# Altium PCB Main Board.PcbDoc (part 1 of 2)
Units mm, origin at the board's own origin, x right, y up, seen from the top; angles counter-clockwise.
Board outline 100 x 75.8 mm, 4 copper layers (Top Layer, L1, L2, Bottom Layer), stack 1.743 mm thick; 166 components, 146 nets, 691 pads, 603 vias.
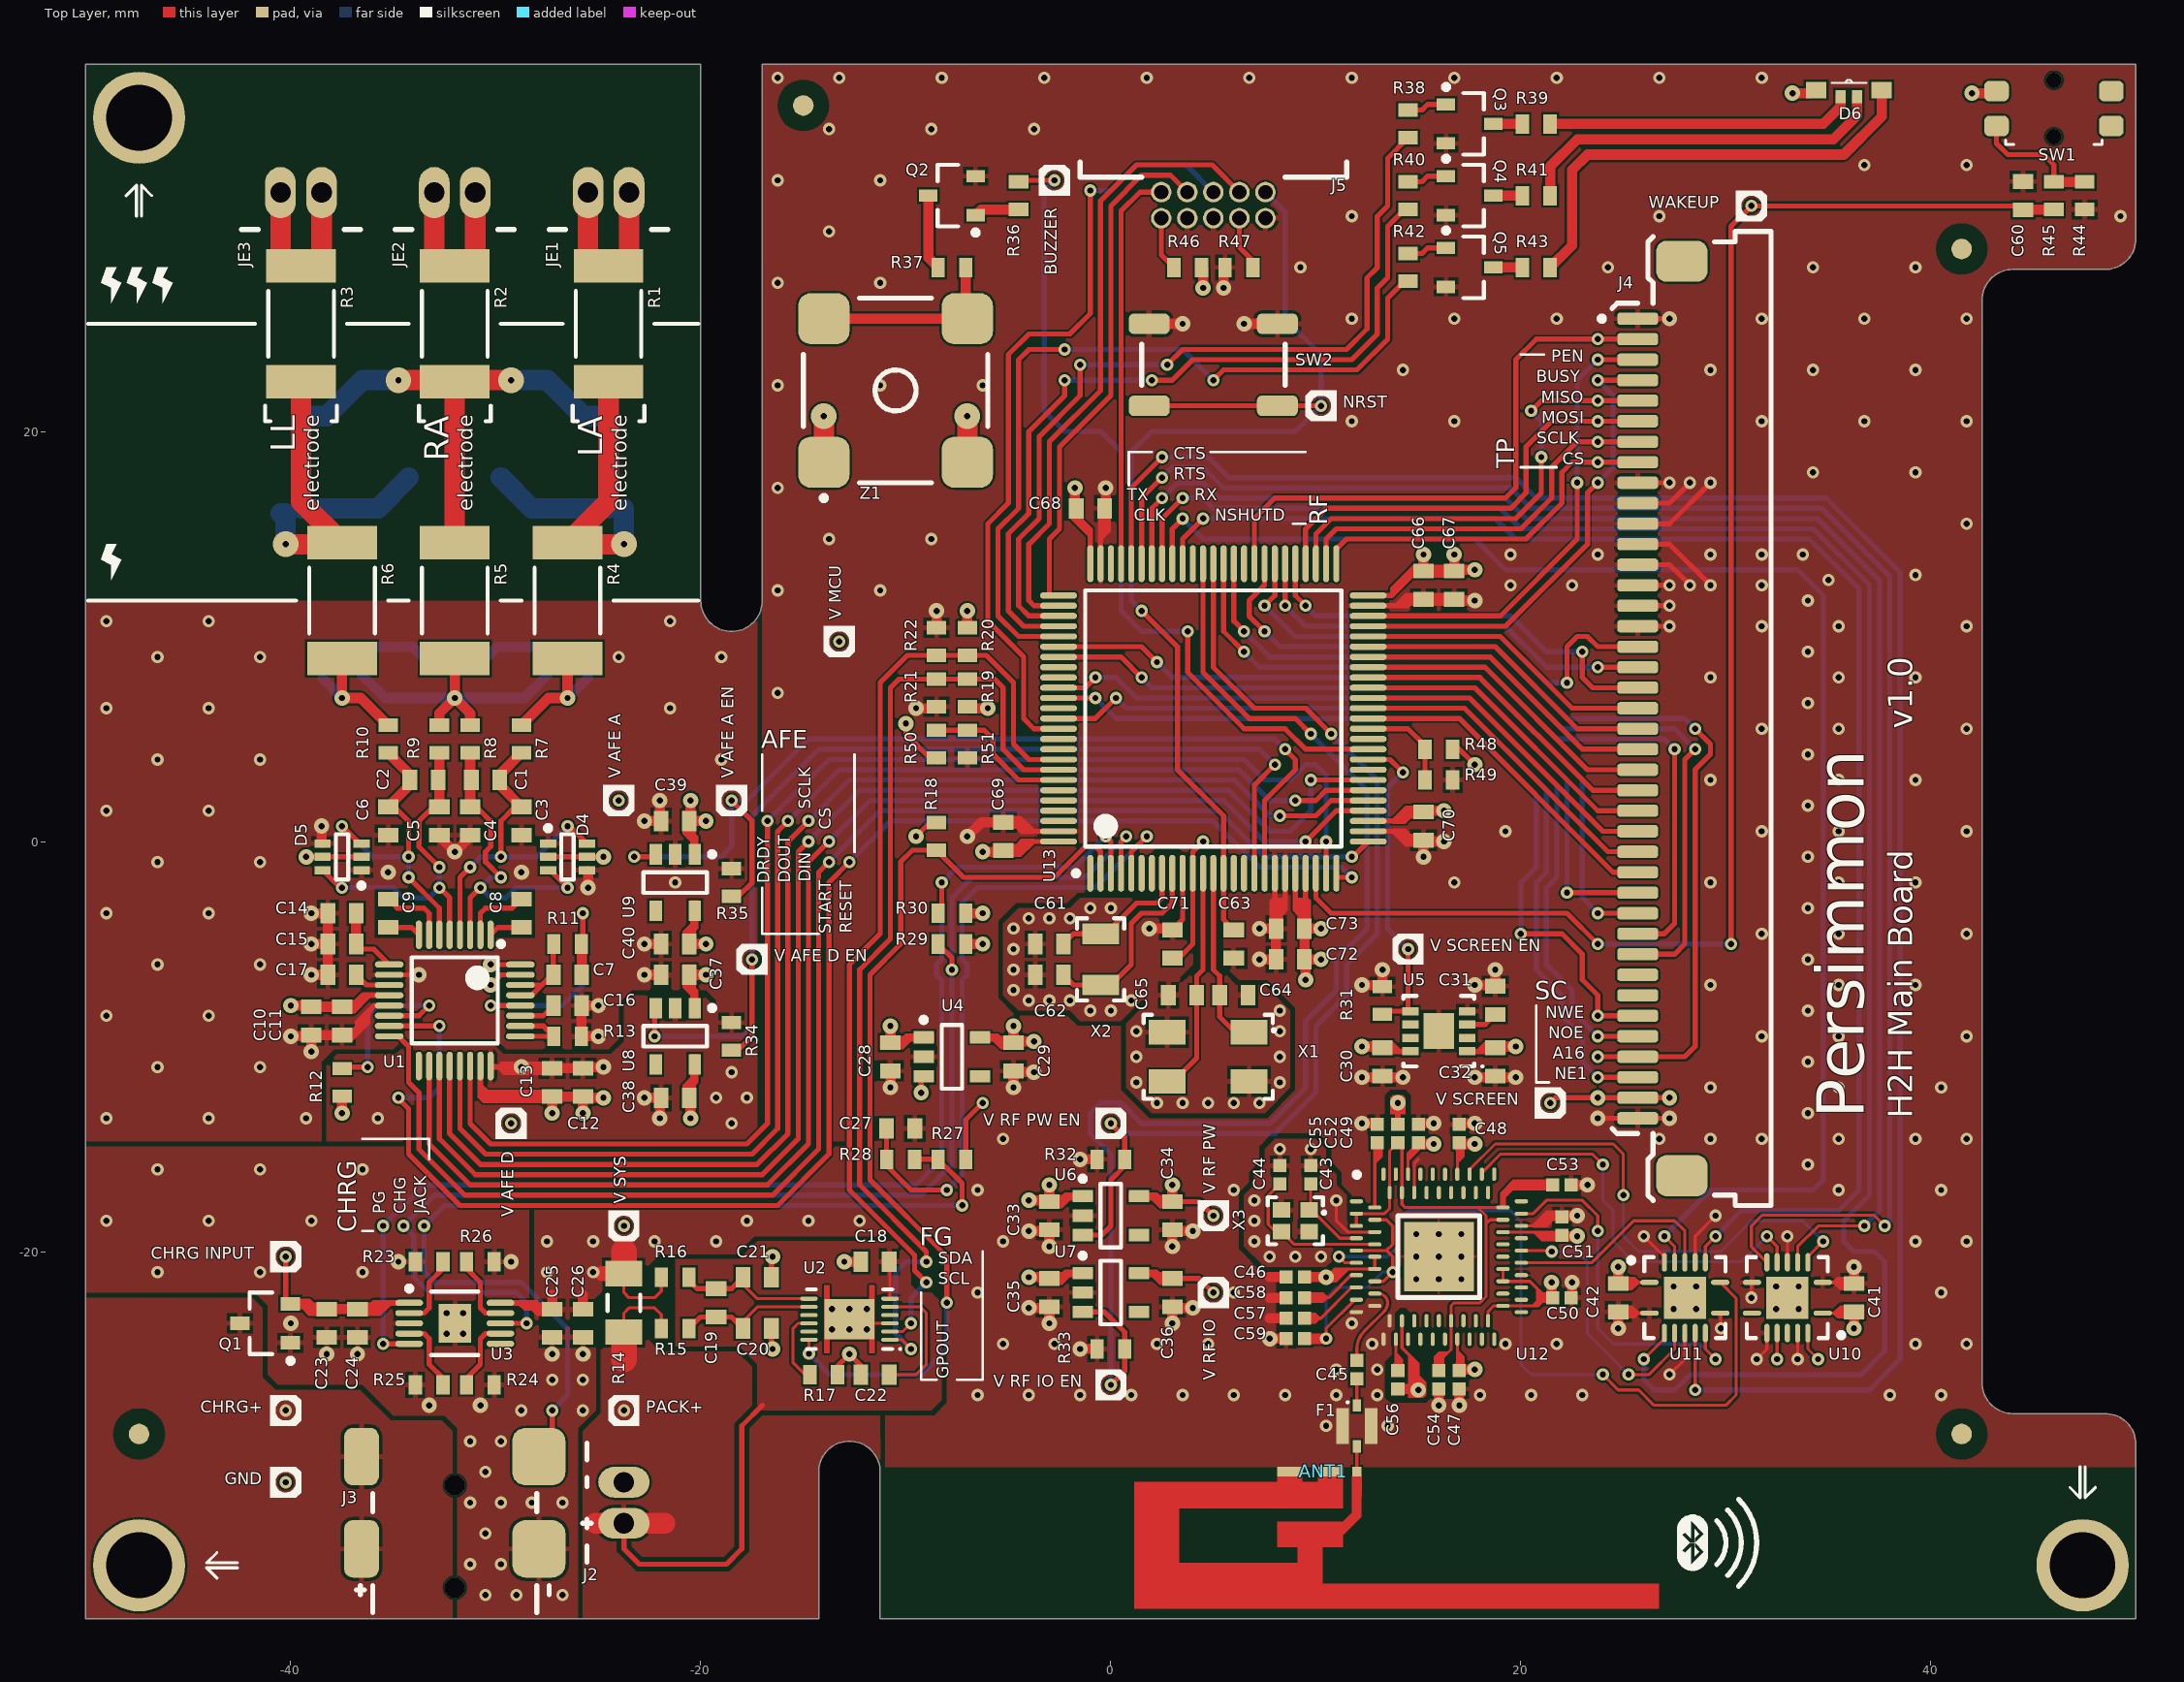
[diagram p0: Top Layer view]
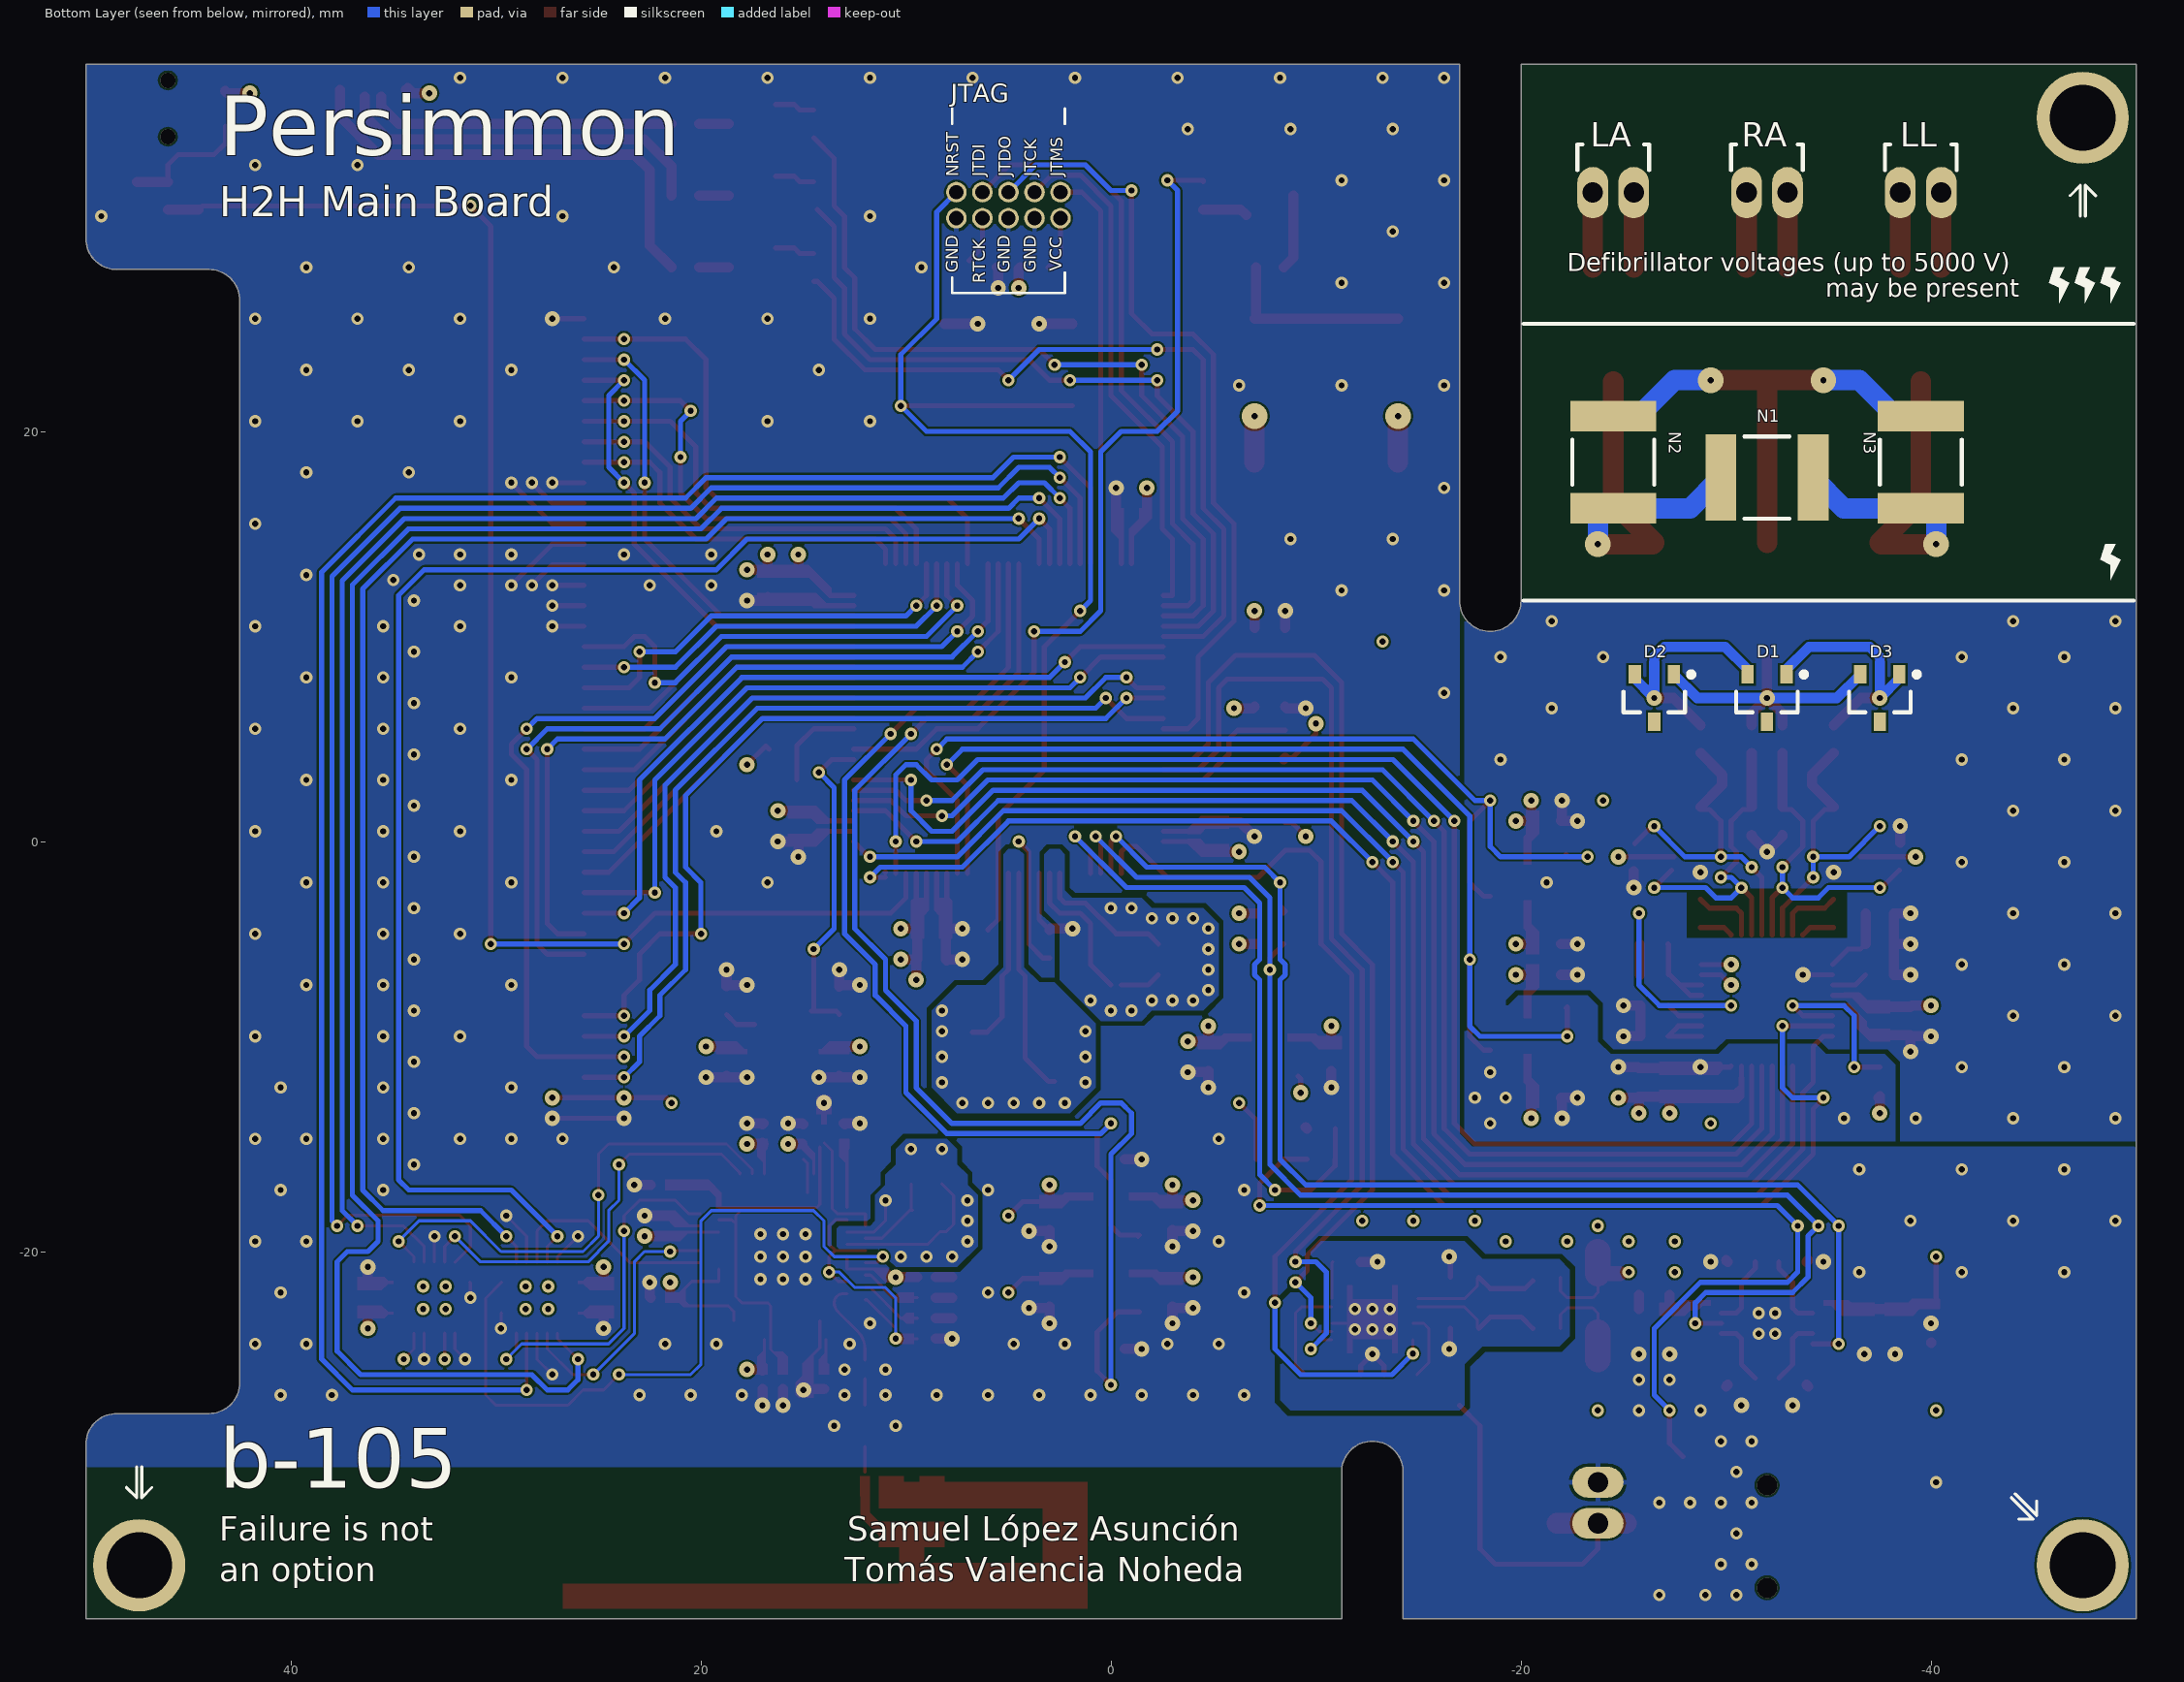
[diagram p1: Bottom Layer view, seen from below]
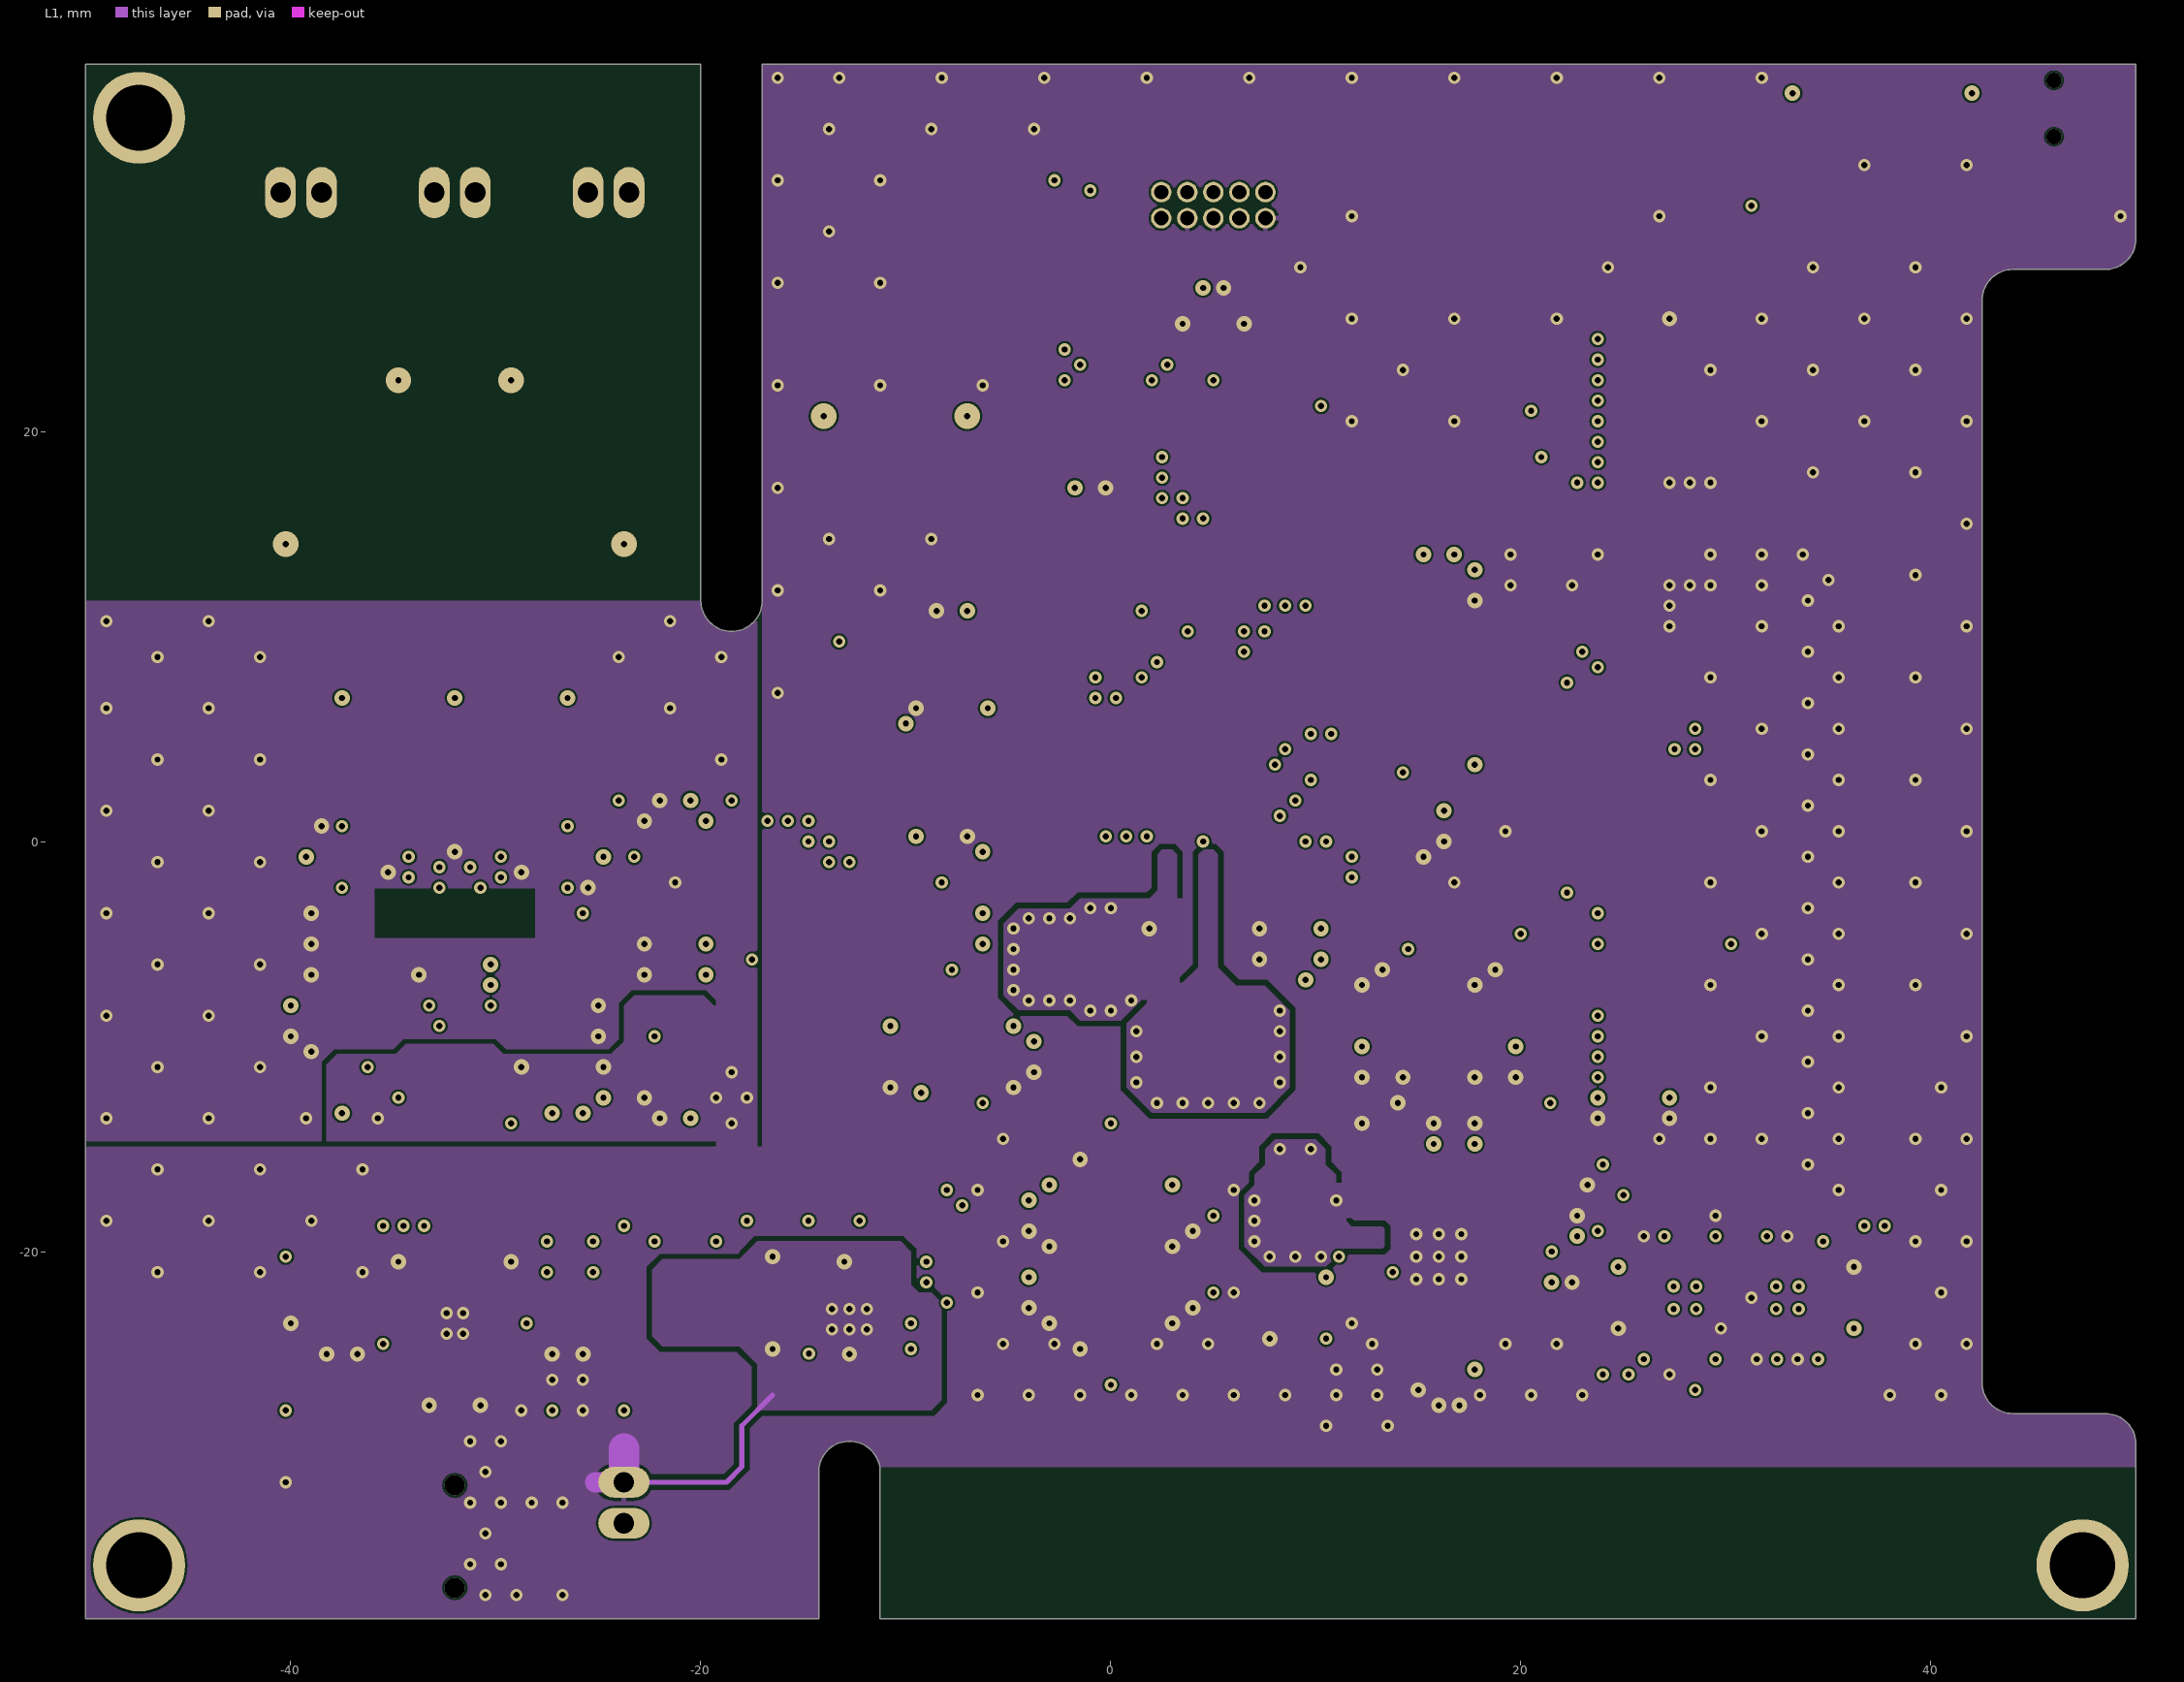
[diagram p2: L1]
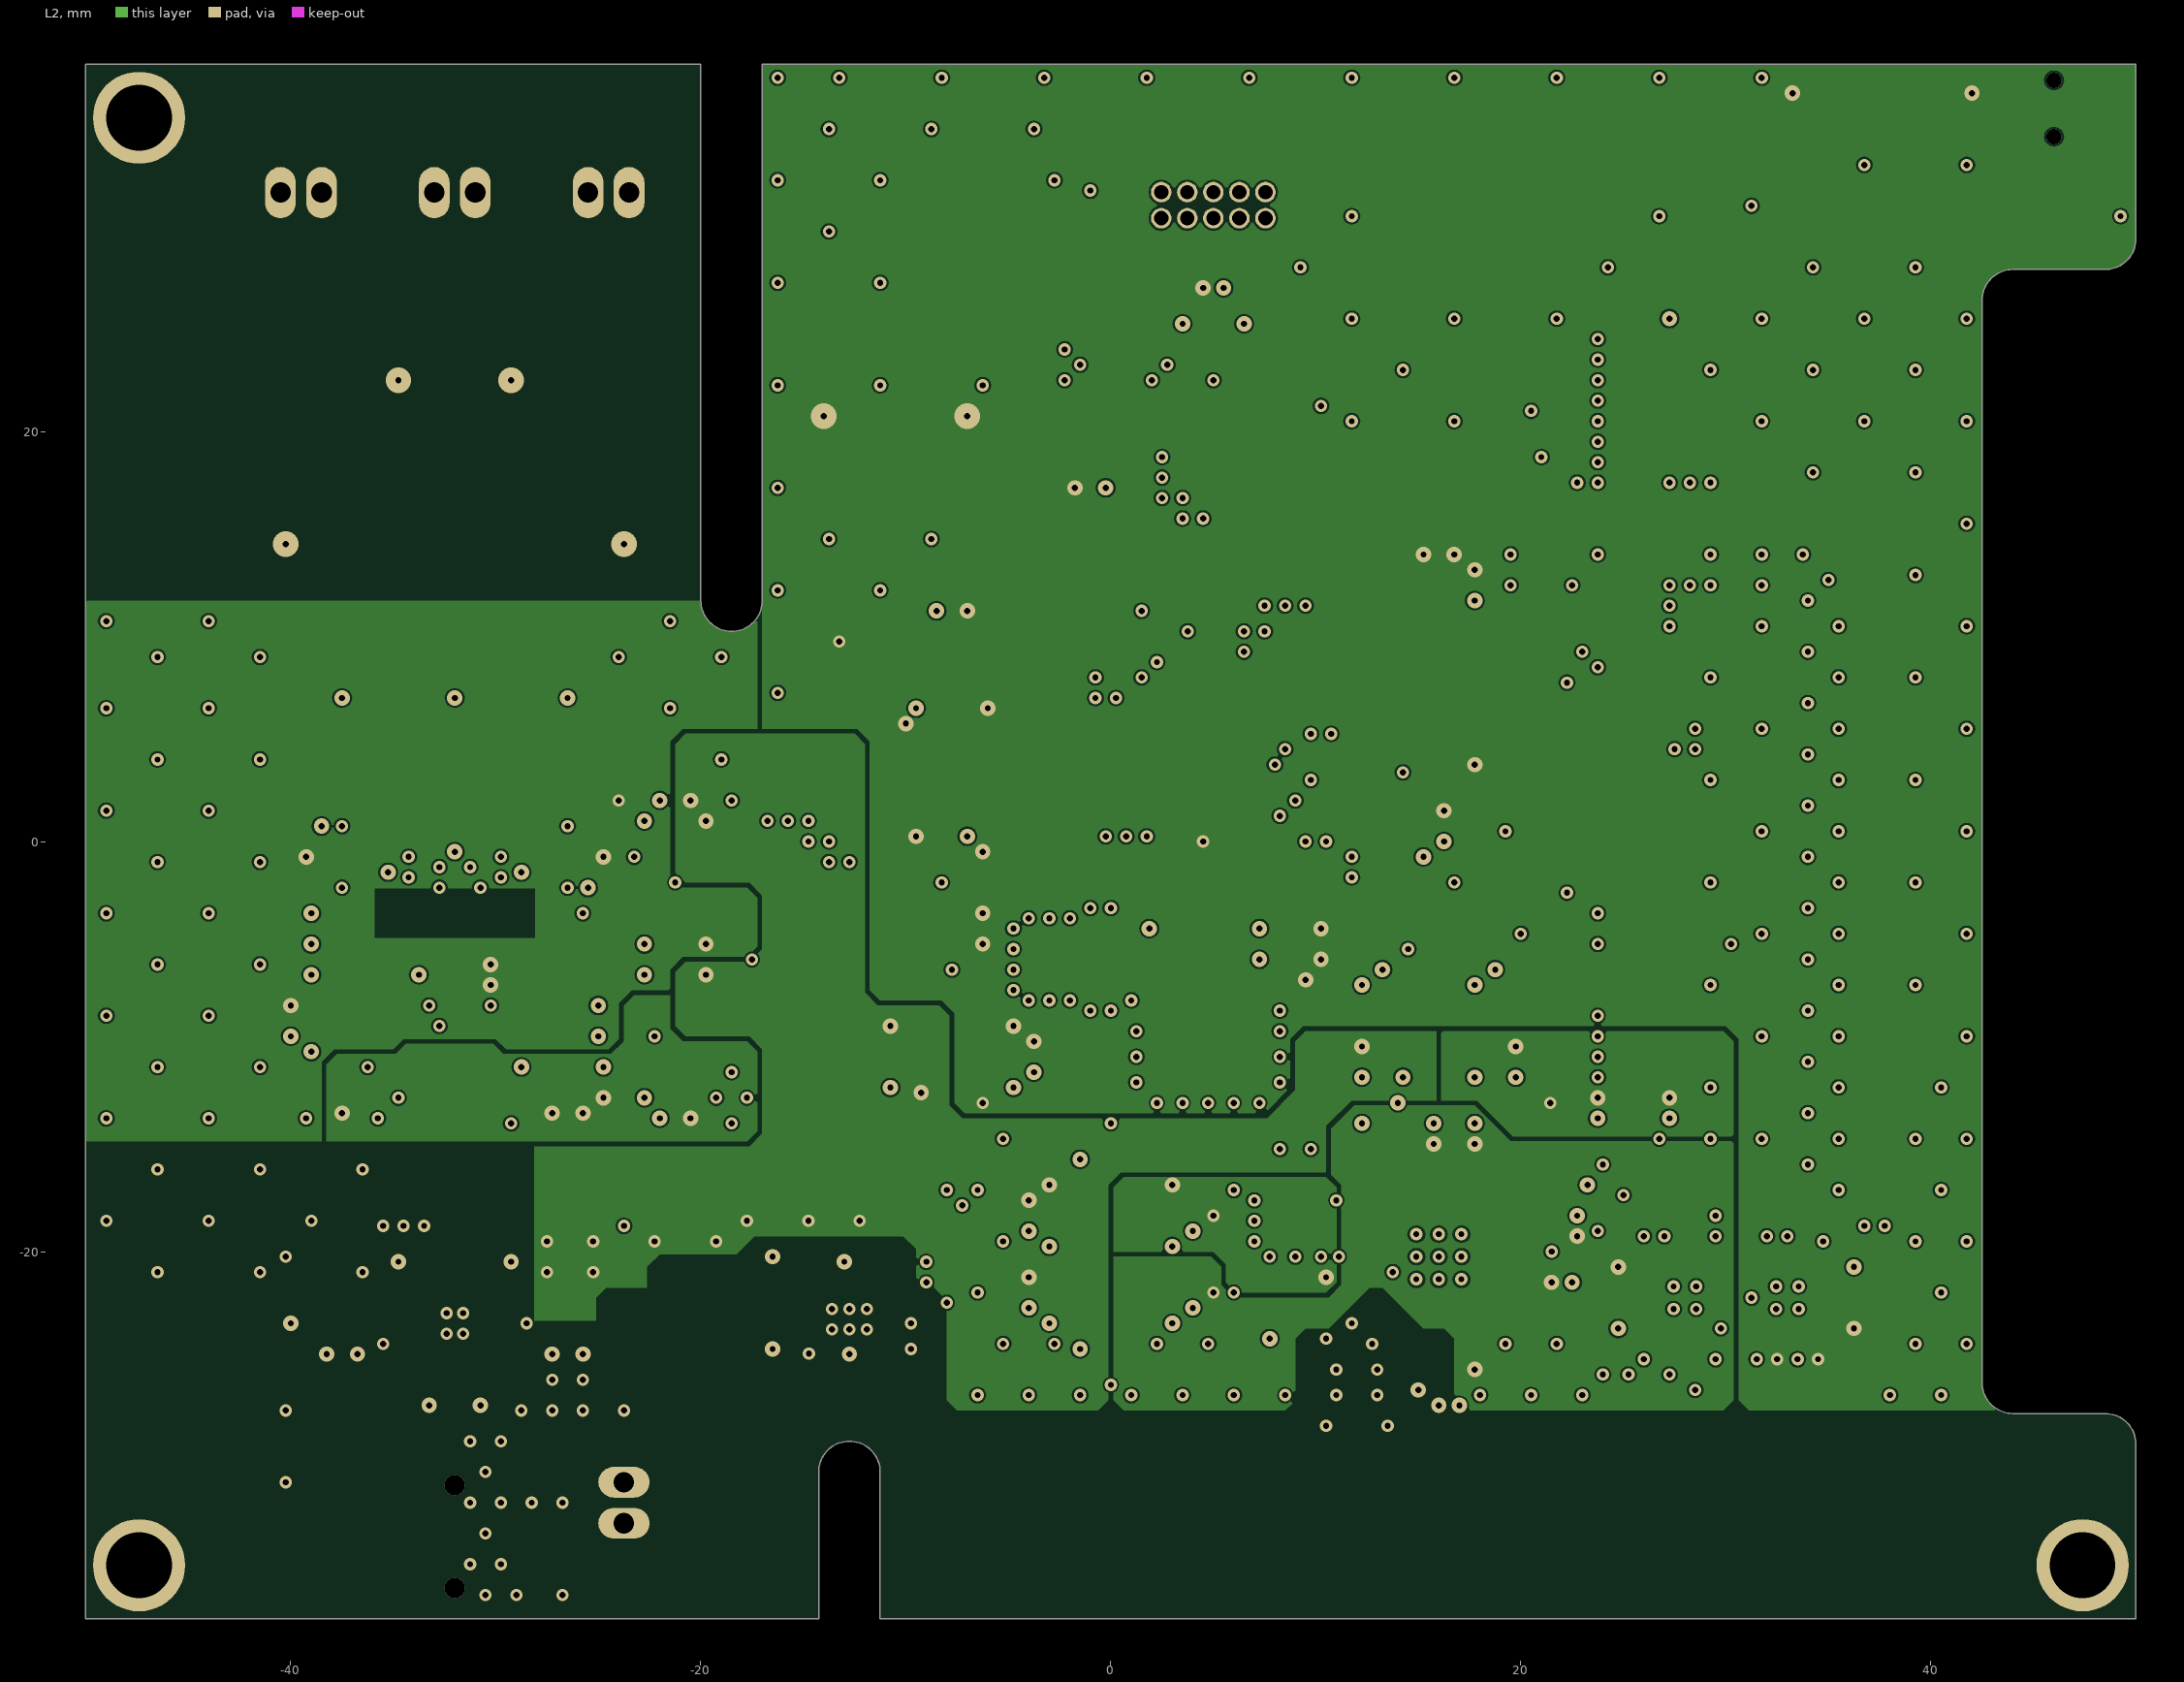
[diagram p3: L2]

## Layer stack, top to bottom
Top Solder: solder mask 0.0102, Solder Resist, Dk 3.5
Top Layer: signal copper 0.0356
Dielectric 1: core 0.2, FR-4, Dk 4.2
L1: signal copper 0.036
Dielectric 2: prepreg 1.2, FR-4, Dk 4.2
L2: signal copper 0.036
Dielectric 3: core 0.2, FR-4, Dk 4.2
Bottom Layer: signal copper 0.0356
Bottom Solder: solder mask 0.0102, Solder Resist, Dk 3.5

## Board outline
-14.25,-37.9 -14.25,-30.75 cw(c-12.75,-30.75) -12.75,-29.25 cw(c-12.75,-30.75) -11.25,-30.75 -11.25,-37.9 50,-37.9 50,-29.4 ccw(c48.5,-29.4) 48.5,-27.9 44,-27.9 cw(c44,-26.4) 42.5,-26.4 42.5,26.4 cw(c44,26.4) 44,27.9 48.5,27.9 ccw(c48.5,29.4) 50,29.4 50,37.9 -17,37.9 -17,11.75 cw(c-18.5,11.75) -18.5,10.25 cw(c-18.5,11.75) -20,11.75 -20,37.9 -50,37.9 -50,-37.9

## Design rules (kind name [scope] priority, off if disabled: settings)
Clearance "Fiducial Clearance" [(InPadClass('Fiducial Pads'))] p1: gap=0.75
Clearance "DefibProof Clearance" [InNetClass('DefibProof')] p2: gap=4
Clearance "DefibProofGDT Clearance" [InNetClass('DefibProofGDT')] p3: gap=2
Clearance "QFN Double Row Clearance" [InComponent('U12')] p4: gap=0.125
Clearance [All] p5: gap=0.1
ComponentClearance [All] p1: gap=0.25 collisioncheckmode=3 verticalgap=0.25 showdistances=FALSE
DiffPairsRouting [All] p1: maxlimit=0.5 minlimit=0.15 mostfreqgap=0.25 toplayer_minwidth=0.15 toplayer_maxwidth=2 toplayer_prefwidth=0.25 midlayer1_minwidth=0.15 midlayer1_maxwidth=2 midlayer1_prefwidth=0.25 midlayer2_minwidth=0.15 midlayer2_maxwidth=2 midlayer2_prefwidth=0.25 bottomlayer_minwidth=0.15 bottomlayer_maxwidth=2 bottomlayer_prefwidth=0.25 maxuncoupledlength=12.7
Height [All] p1: minheight=0 maxheight=25 prefheight=10
HoleSize [All] p1: absolutevalues=TRUE maxlimit=6.3 minlimit=0.3 maxpercent=80.000 minpercent=20.000
MinimumSolderMaskSliver [All] p1: minsoldermaskwidth=0.2
PlaneClearance [All] p1: clearance=0.3
PlaneConnect [All] p1: planeconnectstyle=Relief reliefexpansion=0.5 reliefentries=4 reliefconductorwidth=0.3 reliefairgap=0.3
PolygonConnect "GND RF" [All vs (InPadClass('RF GND Pads'))] p1: connectstyle=Direct reliefconductorwidth=0.125 reliefentries=4 polygonreliefangle="90 Angle" airgapwidth=0.125
PolygonConnect "GND Via Ring" [All vs IsVia] p2: connectstyle=Direct reliefconductorwidth=0.254 reliefentries=4 polygonreliefangle="90 Angle" airgapwidth=0.254
PolygonConnect "QFN Double Row" [All vs InComponent('U12')] p3: connectstyle=Relief reliefconductorwidth=0.125 reliefentries=4 polygonreliefangle="90 Angle" airgapwidth=0.125
PolygonConnect Default [All] p4: connectstyle=Relief reliefconductorwidth=0.25 reliefentries=4 polygonreliefangle="90 Angle" airgapwidth=0.15
RoutingVias [All] p1: holewidth=0.3 width=0.6 viastyle="Through Hole" minholewidth=0.3 minwidth=0.6 maxholewidth=6.3 maxwidth=5
SolderMaskExpansion [All] p1: expansion=0.102
Width [All] p1: maxlimit=2 minlimit=0.125 preferedwidth=0.25
23 further rules are at their usual default settings.

## Classes and differential pairs
pad class "Fiducial Pads": Free-FID1 Free-FID2 Free-FID3 Free-FID4
pad class "RF GND Pads": ANT1-2 F1-1 F1-3 U12-A10 U12-A11 U12-B9 U12-B10
net class "50 Ohm Line": BT_OUT NetANT1_1 NetC45_2
component class U_AFE: C1 C2 C3 C4 C5 C6 C7 C8 C9 C10 C11 C12 C13 C14 C15 C16 C17 D1 D2 D3 D4 D5 JE1 JE2 JE3 N1 N2 N3 R1 R2 R3 R4 R5 R6 R7 R8 R9 R10 R11 R12 R13 U1
component class U_Battery: C18 C19 C20 C21 C22 C23 C24 C25 C26 C27 J2 J3 Q1 R14 R15 R16 R17 R18 R19 R20 R21 R22 R23 R24 R25 R26 R27 R28 R29 R30 U2 U3
component class U_MCU: C60 C61 C62 C63 C64 C65 C66 C67 C68 C69 C70 C71 C72 C73 J5 R44 R45 R46 R47 R48 R49 R50 R51 SW1 SW2 U13 X1 X2
component class U_RF: ANT1 C41 C42 C43 C44 C45 C46 C47 C48 C49 C50 C51 C52 C53 C54 C55 C56 C57 C58 C59 F1 U10 U11 U12 X3
component class "U_User Interface": D6 J4 Q2 Q3 Q4 Q5 R36 R37 R38 R39 R40 R41 R42 R43 Z1
component class "U_Voltage Regulation": C28 C29 C30 C31 C32 C33 C34 C35 C36 C37 C38 C39 C40 R31 R32 R33 R34 R35 U4 U5 U6 U7 U8 U9
net class FSMC_D[15..0]: FSMC_D0 FSMC_D1 FSMC_D2 FSMC_D3 FSMC_D4 FSMC_D5 FSMC_D6 FSMC_D7 FSMC_D8 FSMC_D9 FSMC_D10 FSMC_D11 FSMC_D12 FSMC_D13 FSMC_D14 FSMC_D15
net class DefibProof: LA LL RA
net class DefibProofGDT: NetN1_1 NetN1_2 NetN2_1
differential pair X2: +X2_P -X2_N
differential pair X1: +X1_P -X1_N
differential pair AFE_IN1: +AFE_IN1_P -AFE_IN1_N
differential pair AFE_IN2: +AFE_IN2_P -AFE_IN2_N
differential pair FG_SR: +FG_SR_P -FG_SR_N

## Components (designator, comment, footprint, x,y, rotation, side; value= is the part's Value field where it differs from the comment)
ANT1 "2.4 GHz F-antenna" "Antenna Inverted F 2.4 GHz" 12,-30.5 r0 top net-tie
C1 "6.8n" C0603 -30.5,3 r0 top
C2 "6.8n" C0603 -33.5,3 r0 top
C3 "47p" C0603 -28.75,1 r90 top
C4 "47p" C0603 -31.25,1 r270 top
C5 "47p" C0603 -32.75,1 r90 top
C6 "47p" C0603 -35.25,1 r270 top
C7 "1.5n" C0603 -26.5,-6.5 r0 top
C8 "4.7n" C0603 -28.75,-3.5 r270 top
C9 "4.7n" C0603 -35.25,-3.5 r90 top
C10 "1u" C0603 -39,-8.75 r90 top
C11 "0.1u" C0603 -37.5,-8.75 r90 top
C12 "1u" C0603 -25.75,-11.75 r270 top
C13 "0.1u" C0603 -27.25,-11.75 r270 top
C14 "10u" C0603 -37.5,-3.5 r0 top
C15 "0.1u" C0603 -37.5,-5 r0 top
C16 "1u" C0603 -26.5,-8 r180 top
C17 "1u" C0603 -37.5,-6.5 r0 top
C18 "1u" C0603 -11.5,-20.5 r0 top
C19 "0.1u" C0603 -19.25,-22.5 r270 top
C20 "0.1u" C0603 -17.25,-23.75 r180 top
C21 "0.1u" C0603 -17.25,-21.25 r0 top
C22 "0.47u" C0603 -11.5,-26 r0 top
C23 "1u" C0603 -38.25,-23.5 r90 top
C24 "0.1u" C0603 -36.75,-23.5 r90 top
C25 "0.1u" C0603 -27.25,-23.5 r90 top
C26 "1u" C0603 -25.75,-23.5 r90 top
C27 "0.1u" C0603 -10.25,-14 r180 top
C28 "1u" C0603 -10.75,-10.5 r90 top
C29 "1u" C0603 -4.75,-10.5 r90 top
C30 "1u" C0603 13.25,-10.75 r90 top
C31 "0.1u" C0603 18.75,-7.75 r270 top
C32 "1u" C0603 18.75,-10.75 r90 top
C33 "1u" C0603 -3,-18.25 r90 top
C34 "1u" C0603 3,-18.25 r90 top
C35 "1u" C0603 -3,-22 r90 top
C36 "1u" C0603 3,-22 r90 top
C37 "1u" C0603 -21.25,-6.5 r0 top
C38 "1u" C0603 -21.25,-12.5 r0 top
C39 "1u" C0603 -21.25,1 r0 top
C40 "1u" C0603 -21.25,-5 r0 top
C41 "0.1u" C0603 36.25,-22.25 r270 top
C42 "0.1u" C0603 24.75,-22.25 r90 top
C43 "12p" C0402 9.75,-16.25 r270 top
C44 "12p" C0402 8.25,-16.25 r270 top
C45 "22p" C0402 12,-25.75 r270 top
C46 "1u" C0402 9,-21.25 r0 top
C47 "0.1u" C0402 17,-26.25 r90 top
C48 "0.1u" C0402 17,-14.25 r270 top
C49 "0.1u" C0402 15,-14.25 r270 top
C50 "0.1u" C0402 22,-22.25 r180 top
C51 "0.1u" C0402 22,-18.75 r270 top
C52 "0.1u" C0402 14,-14.25 r270 top
C53 "0.47u" C0402 22,-16.75 r180 top
C54 "0.47u" C0402 16,-26.25 r90 top
C55 "0.1u" C0402 13,-14.25 r270 top
C56 "0.1u" C0402 14,-26.25 r90 top
C57 "0.1u" C0402 9,-23.25 r0 top
C58 "0.1u" C0402 9,-22.25 r0 top
C59 "1u" C0402 9,-24.25 r0 top
C60 "0.47u" C0603 44.5,31.5 r270 top
C61 "6p" C0603 -3,-5 r0 top
C62 "6p" C0603 -3,-6.5 r0 top
C63 "10n" C0603 6,-5 r90 top
C64 "10p" C0603 6,-7.5 r180 top
C65 "10p" C0603 3.5,-7.5 r0 top
C66 "10u" C0603 15.25,12.5 r90 top
C67 "0.1u" C0603 16.75,12.5 r90 top
C68 "0.1u" C0603 -1,16.25 r180 top
C69 "0.1u" C0603 -5.25,0.25 r270 top
C70 "0.1u" C0603 15.25,0.75 r90 top
C71 "0.1u" C0603 3,-5 r270 top
C72 "1u" C0603 8.75,-5.75 r0 top
C73 "0.1u" C0603 8.75,-4.25 r0 top
D1 "PESD5V0X1" PESD5V0X1BT -32,7 r270 bottom
D2 "PESD5V0X1" PESD5V0X1BT -26.5,7 r270 bottom
D3 "PESD5V0X1" PESD5V0X1BT -37.5,7 r270 bottom
D4 "BAS70DW-04" BAS70DW-04 -26.5,-0.75 r0 top
D5 "BAS70DW-04" BAS70DW-04 -37.5,-0.75 r180 top
D6 "OVSRRGBCC3" OVSRRGBCC3/SIDE 36,37.9 r270 top locked
F1 "LFB212G45SG8A127" LFB212G45SG8A127 12,-28.5 r270 top
J2 "JST PH 2 Pin" S2B-PH-K-S -17.5,-32.25 r90 top
J3 "PJ-018H-SMT" PJ-018H-SMT -32,-37.9 r90 top
J4 "FFC 40 Pin" ER-CON40HB-2 32,6 r270 top
J5 "JTAG 10 Pin" 3220-10-0200-00 5,37.9 r0 top
JE1 "JST PH 2 Pin" S2B-PH-K-S -24.5,37.9 r180 top
JE2 "JST PH 2 Pin" S2B-PH-K-S -32,37.9 r180 top
JE3 "JST PH 2 Pin" S2B-PH-K-S -39.5,37.9 r180 top
N1 "GDT" 2051-09-SM -32,17.75 r0 bottom
N2 "GDT" 2051-09-SM -24.5,18.5 r270 bottom
N3 "GDT" 2051-09-SM -39.5,18.5 r90 bottom
Q1 "DMP3056L" DMP3056L -41.25,-23.5 r180 top
Q2 "2N7002P" 2N7002P -7.75,31.5 r180 top
Q3 "2N7002P" 2N7002P 17.5,35 r0 top
Q4 "2N7002P" 2N7002P 17.5,31.5 r0 top
Q5 "2N7002P" 2N7002P 17.5,28 r0 top
R1 "22k" R2512 -24.5,25.25 r270 top
R2 "22k" R2512 -32,25.25 r270 top
R3 "22k" R2512 -39.5,25.25 r270 top
R4 "22k" R2512 -26.5,11.75 r270 top
R5 "22k" R2512 -32,11.75 r270 top
R6 "22k" R2512 -37.5,11.75 r270 top
R7 "47k" R0603 -28.75,5 r270 top
R8 "47k" R0603 -31.25,5 r270 top
R9 "47k" R0603 -32.75,5 r270 top
R10 "47k" R0603 -35.25,5 r270 top
R11 "1M" R0603 -26.5,-5 r180 top
R12 "100" R0603 -37.5,-11.75 r90 top
R13 "100" R0603 -26.5,-9.5 r0 top
R14 "0.01" R1206 -23.75,-22.5 r90 top
R15 "100" R0603 -21.25,-23.75 r0 top
R16 "100" R0603 -21.25,-21.25 r0 top
R17 "1M" R0603 -14,-26 r0 top
R18 "10k" R0603 -8.5,0.25 r270 top
R19 "10k" R0603 -7,7.25 r90 top
R20 "10k" R0603 -7,9.75 r270 top
R21 "1M" R0603 -8.5,7.25 r270 top
R22 "1M" R0603 -8.5,9.75 r90 top
R23 "1.2k" R0603 -33.25,-20.5 r180 top
R24 "0" R0603 -30.75,-26.5 r0 top
R25 "2k" R0603 -33.25,-26.5 r180 top
R26 "10k" R0603 -30.75,-20.5 r0 top
R27 "1M" R0603 -7.75,-15.5 r180 top
R28 "470k" R0603 -10.25,-15.5 r0 top
R29 "100k" R0603 -7.75,-5 r180 top
R30 "100k" R0603 -7.75,-3.5 r180 top
R31 "1M" R0603 13.25,-7.75 r90 top
R32 "1M" R0603 0,-15.5 r180 top
R33 "1M" R0603 0,-24.75 r180 top
R34 "1M" R0603 -18.5,-9.5 r90 top
R35 "1M" R0603 -18.5,-2 r90 top
R36 "100" R0603 -4.5,31.5 r270 top
R37 "0" R0603 -7.75,28 r180 top
R38 "100" R0603 14.5,35 r90 top
R39 "680" R0603 20.75,35 r0 top
R40 "100" R0603 14.5,31.5 r90 top
R41 "220" R0603 20.75,31.5 r180 top
R42 "100" R0603 14.5,28 r270 top
R43 "220" R0603 20.75,28 r0 top
R44 "10k" R0603 47.5,31.5 r90 top
R45 "100k" R0603 46,31.5 r270 top
R46 "0" R0603 3.75,28 r180 top
R47 "10k" R0603 6.25,28 r0 top
R48 "10k" R0603 16,4.5 r0 top
R49 "10k" R0603 16,3 r180 top
R50 "10k" R0603 -8.5,4.75 r270 top
R51 "10k" R0603 -7,4.75 r90 top
SW1 "WS-TASU 436331045822" "WS-TASU 436331045822" 46,37.5 r180 top
SW2 "EVQ-Q2K01W" EVQ-Q2K01W 5,23.25 r180 top
U1 "ADS1292" ADS129x -32,-7.75 r270 top
U2 "BQ27441DRZR-G1A" BQ27441DRZx-G1A -12.75,-23.3 r180 top
U3 "BQ24090" BQ24090 -32,-23.5 r0 top
U4 "LP5907-3.3" LP5907 -7.75,-10.5 r0 top
U5 "TPS73633" TPS73633 16,-9.25 r180 top
U6 "LP5907-3.3" LP5907 0,-18.25 r0 top
U7 "LP5907-1.8" LP5907 0,-22 r0 top
U8 "LP5907-3.3" LP5907 -21.25,-9.5 r270 top
U9 "LP5907-3.3" LP5907 -21.25,-2 r270 top
U10 "SN74LV4T125" SN74LV4T125 33,-22.25 r180 top
U11 "SN74LV4T125" SN74LV4T125 28,-22.25 r0 top
U12 "CC2560A" CC256x 16,-20.25 r0 top
U13 "STM32L162VDT6" STM-LQFP100_N 5,6 r90 top
X1 "ABM3B-16.000MHZ-10-1-U" ABM3B-16.000MHZ-10-1-U 4.75,-10.5 r180 top
X2 "ABS07-120-32.768KHZ-T" ABS07-120-32.768KHZ-T -0.5,-5.75 r90 top
X3 "NX2016SA" NX2016SA 9,-18.5 r180 top
Z1 "2.7 kHz" KSSG74B16 -10.5,22 r0 top

## Footprints (in the part's own frame and the unit in brackets; to place one, negate y for a bottom-side part, rotate by r counter-clockwise, add the part's x,y. Pads: shape width x height; smd on the part's side, far side on the other; paste and mask are expansions set on the pad)
2N7002P [mm] "Transistor - MOSFET, N-Channel, 60V, 300mA"
  rect 0.9x0.6 smd: 1(-1.15,0.95) 2(-1.15,-0.95) 3(1.15,0)
  silkscreen extent -1.28,-1.5 0.7,1.92, body extent -0.7,-1.5 0.7,1.5, height 1.1
2051-09-SM [mm] "TVS - Gas Discharge Tube"
  rect 1.5x4.2 smd: 1(-2.25,0) 2(2.25,0)
  silkscreen extent -1.1,-2 1.1,2, body extent -2.4,-1.75 2.4,1.75, height 3
3220-10-0200-00 [mm] "Conn - JTAG, Header, Male, Right Angle, 10 Pin, 1.27mm Pitch, ARM Standard"
  round 1 hole 0.7 mask+0.05: 1(-2.54,-7.5) 2(-2.54,-6.23) 3(-1.27,-7.5) 4(-1.27,-6.23) 5(0,-7.5) 6(0,-6.23) 7(1.27,-7.5) 8(1.27,-6.23) 9(2.54,-7.5) 10(2.54,-6.23)
  silkscreen extent -6.5,-5.5 6.5,-4.75, body extent -6.35,-7.7 6.35,0, height 5.1
ABM3B-16.000MHZ-10-1-U [mm] "Crystal 16 MHz"
  rect 1.8x1.2 smd: 1(-2,-1.2) 2(2,-1.2) 3(2,1.2) 4(-2,1.2)
  silkscreen extent -3.22,-2.05 3.15,2.05, body extent -2.5,-1.6 2.5,1.6, height 1.1
ABS07-120-32.768KHZ-T [mm] "DFN, 2-Leads, Body 1,50x3,20mm, Pitch 2,45mm, IPC Medium Density"
  rect 1x1.8 smd: 1(-1.25,0) 2(1.25,0)
  silkscreen extent -2,-1.15 2,1.15, body extent -1.68,-0.82 1.68,0.82, height 0.9
ADS129x [mm] "TSQFP, 32-Leads, Body 5,00x5,00mm, Pitch 0,50mm, IPC Medium Density"
  oval 1.4x0.3 smd mask+0.05: 1(-3.2,1.75) 2(-3.2,1.25) 3(-3.2,0.75) 4(-3.2,0.25) 5(-3.2,-0.25) 6(-3.2,-0.75) 7(-3.2,-1.25) 8(-3.2,-1.75) 17(3.2,-1.75) 18(3.2,-1.25) 19(3.2,-0.75) 20(3.2,-0.25) 21(3.2,0.25) 22(3.2,0.75) 23(3.2,1.25) 24(3.2,1.75)
  oval 0.3x1.4 smd mask+0.05: 9(-1.75,-3.2) 10(-1.25,-3.2) 11(-0.75,-3.2) 12(-0.25,-3.2) 13(0.25,-3.2) 14(0.75,-3.2) 15(1.25,-3.2) 16(1.75,-3.2) 25(1.75,3.2) 26(1.25,3.2) 27(0.75,3.2) 28(0.25,3.2) 29(-0.25,3.2) 30(-0.75,3.2) 31(-1.25,3.2) 32(-1.75,3.2)
  silkscreen extent -2.87,-2.1 2.1,2.38, body extent -2.5,-2.5 2.5,2.5, height 1.2
"Antenna Inverted F 2.4 GHz" [mm] "Antenna - Inverted F 2.4 GHz"
  rect 0.46x0.46 smd paste-1.2: 1(0,-0.23)
  rect 1.2x0.46 smd paste-1.2: 2(-3.28,-0.23) 2(-1.28,-0.23)
  Top Layer region: -0.68,-0.46 -0.68,-2.03 -8.68,-2.03 -8.68,-4.7 -2.88,-4.7 -2.88,-3.9 -3.88,-3.9 -3.88,-2.69 -0.68,-2.69 -0.23,-2.24 -0.23,-0.46 0.229,-0.46 0.225,-2.435 -0.68,-3.34 -0.68,-3.9 -1.68,-3.9 -1.68,-5.7 14.72,-5.7 14.72,-6.91 -10.86,-6.91 -10.86,-0.74 -3.88,-0.74 -3.88,-0.46 -2.68,-0.46 -2.68,-0.74 -1.88,-0.74 -1.88,-0.46
BAS70DW-04 [mm] "SOT23, 6-Leads, Body 2,00x2,10mm, Pitch 0,65mm, IPC Medium Density"
  rect 0.8x0.4 smd mask+0.05: 1(-0.95,0.65) 2(-0.95,0) 3(-0.95,-0.65) 4(0.95,-0.65) 5(0.95,0) 6(0.95,0.65)
  silkscreen extent -1.07,-1.1 0.3,1.52, body extent -0.67,-1.1 0.67,1.1, height 1.1
BQ24090 [mm] "TSSOP, 10-Leads, Body 3,00x3,00mm, Pitch 0,50mm, Thermal Pad 1,88x1,57mm, IPC Medium Density"
  oval 1.35x0.3 smd mask+0.05: 1(-2.225,1) 2(-2.225,0.5) 3(-2.225,0) 4(-2.225,-0.5) 5(-2.225,-1) 6(2.225,-1) 7(2.225,-0.5) 8(2.225,0) 9(2.225,0.5) 10(2.225,1)
  rect 1.57x1.88 smd mask+0.05: Pad(0,0)
  silkscreen extent -2.35,-1.55 1.15,1.82, body extent -1.55,-1.55 1.55,1.55, height 1.1
BQ27441DRZx-G1A [mm] "SON, 12-Leads, Body 4x2.5mm, Pitch 0.4mm, Thermal Pad 1.95x2.45mm, TI Recommended"
  oval 0.85x0.2 smd paste-0.1 mask+0.05: 1(-1.975,1) 2(-1.975,0.6) 3(-1.975,0.2) 4(-1.975,-0.2) 5(-1.975,-0.6) 6(-1.975,-1) 7(1.975,-1) 8(1.975,-0.6) 9(1.975,-0.2) 10(1.975,0.2) 11(1.975,0.6) 12(1.975,1)
  rect 2.45x1.95 smd paste-0.975 mask+0.05: 13(0,0)
  Top Layer region: -1.225,-1.65 -1.225,1.65 -0.975,1.65 -0.975,0.975 0.975,0.975 0.975,1.65 1.225,1.65 1.225,-1.65 0.975,-1.65 0.975,-0.975 -0.975,-0.975 -0.975,-1.65
  silkscreen extent -2.52,-1.45 2.07,1.5, body extent -2.07,-1.3 2.08,1.3, height 1
C0402 [mm] "Chip Capacitor, 2-Leads, Body 1,00x0,50mm, IPC Medium Density"
  rect 0.64x0.64 smd mask+0.05: 1(-0.45,0) 2(0.45,0)
  body extent -0.5,-0.25 0.5,0.25, height 0.5
C0603 [mm] "Chip Capacitor, 2-Leads, Body 1,55x0,85mm, IPC Medium Density"
  rect 0.72x1 smd: 1(-0.69,0) 2(0.69,0)
  body extent -0.8,-0.48 0.8,0.47, height 0.5
CC256x [mm] "Double Row QFN, 76-Leads, Body 8,00x8,00mm, Pitch 0,60mm, Thermal Pad 3,40x3,40mm, IPC Low Density"
  oval 0.65x0.2 smd mask+0.07: A1(-4.025,2.7) A2(-4.025,2.1) A3(-4.025,1.5) A4(-4.025,0.9) A5(-4.025,0.3) A6(-4.025,-0.3) A7(-4.025,-0.9) A8(-4.025,-1.5) A9(-4.025,-2.1) A10(-4.025,-2.7) A21(4.025,-2.7) A22(4.025,-2.1) A23(4.025,-1.5) A24(4.025,-0.9) A25(4.025,-0.3) A26(4.025,0.3) A27(4.025,0.9) A28(4.025,1.5) A29(4.025,2.1) A30(4.025,2.7) B1(-3.125,2.4) B2(-3.125,1.8) B3(-3.125,1.2) B4(-3.125,0.6) B5(-3.125,0) B6(-3.125,-0.6) B7(-3.125,-1.2) B8(-3.125,-1.8) B9(-3.125,-2.4) B19(3.125,-2.4) B20(3.125,-1.8) B21(3.125,-1.2) B22(3.125,-0.6) B23(3.125,0) B24(3.125,0.6) B25(3.125,1.2) B26(3.125,1.8) B27(3.125,2.4)
  oval 0.2x0.65 smd mask+0.07: A11(-2.7,-4.025) A12(-2.1,-4.025) A13(-1.5,-4.025) A14(-0.9,-4.025) A15(-0.3,-4.025) A16(0.3,-4.025) A17(0.9,-4.025) A18(1.5,-4.025) A19(2.1,-4.025) A20(2.7,-4.025) A31(2.7,4.025) A32(2.1,4.025) A33(1.5,4.025) A34(0.9,4.025) A35(0.3,4.025) A36(-0.3,4.025) A37(-0.9,4.025) A38(-1.5,4.025) A39(-2.1,4.025) A40(-2.7,4.025) B10(-2.4,-3.125) B11(-1.8,-3.125) B12(-1.2,-3.125) B13(-0.6,-3.125) B14(0,-3.125) B15(0.6,-3.125) B16(1.2,-3.125) B17(1.8,-3.125) B18(2.4,-3.125) B28(2.4,3.125) B29(1.8,3.125) B30(1.2,3.125) B31(0.6,3.125) B32(0,3.125) B33(-0.6,3.125) B34(-1.2,3.125) B35(-1.8,3.125) B36(-2.4,3.125)
  rect 3.4x3.4 smd mask+0.07: Pad(0,0)
  silkscreen extent -4.12,-2 2,4.12, body extent -4.05,-4.05 4.05,4.05, height 0.9
DMP3056L [mm] "SOT23, 3-Leads, Body 2,92x2,50mm, Pitch 0,95mm, IPC Medium Density"
  rect 0.95x0.65 smd: 1(-1.235,0.95) 2(-1.235,-0.95) 3(1.235,0)
  silkscreen extent -1.36,-1.5 0.76,1.95, body extent -0.76,-1.52 0.76,1.52, height 1.12
ER-CON40HB-2 [mm] "Conn - FFC/FPC, 40 Pin, 1.0mm Pitch, ZIF"
  rrect50% 0.6x2 smd: 1(-19.5,-6.3) 2(-18.5,-6.3) 3(-17.5,-6.3) 4(-16.5,-6.3) 5(-15.5,-6.3) 6(-14.5,-6.3) 7(-13.5,-6.3) 8(-12.5,-6.3) 9(-11.5,-6.3) 10(-10.5,-6.3) 11(-9.5,-6.3) 12(-8.5,-6.3) 13(-7.5,-6.3) 14(-6.5,-6.3) 15(-5.5,-6.3) 16(-4.5,-6.3) 17(-3.5,-6.3) 18(-2.5,-6.3) 19(-1.5,-6.3) 20(-0.5,-6.3) 21(0.5,-6.3) 22(1.5,-6.3) 23(2.5,-6.3) 24(3.5,-6.3) 25(4.5,-6.3) 26(5.5,-6.3) 27(6.5,-6.3) 28(7.5,-6.3) 29(8.5,-6.3) 30(9.5,-6.3) 31(10.5,-6.3) 32(11.5,-6.3) 33(12.5,-6.3) 34(13.5,-6.3) 35(14.5,-6.3) 36(15.5,-6.3) 37(16.5,-6.3) 38(17.5,-6.3) 39(18.5,-6.3) 40(19.5,-6.3)
  rrect50% 2x2.5 smd: ""(-22.3,-4.15) ""(22.3,-4.15)
  silkscreen extent -23.75,-8.17 23.75,0.2, body extent -23.5,-6.8 23.5,0, height 2.5
EVQ-Q2K01W [mm] "Switch - Tactile, Off-Mom, SPST"
  rrect50% 2x1 smd: 1(-3.125,-2) 2(3.125,-2) 3(3.125,2) 4(-3.125,2)
  silkscreen extent -3.5,-1 3.5,1, body extent -3.5,-3 3.5,3, height 2
KSSG74B16 [mm] "Transductor - Buzzer 2.7 kHz"
  rrect50% 2.5x2.5 smd paste-0.25: 1(-3.5,-3.5) 1(3.5,-3.5) 2(-3.5,3.5) 2(3.5,3.5)
  silkscreen extent -4.5,-5.37 4.5,4.5, body extent -4.25,-4.25 4.25,4.25, height 3
LFB212G45SG8A127 [mm] "Filter - RF 2.4 GHz"
  rect 1.75x0.6 smd mask+0.05: 1(0,0.7) 3(0,-0.7)
  rect 0.6x0.4 smd mask+0.05: 2(1,0) 4(-1,0)
  silkscreen extent -1.2,-0.5 -1.1,-0.4, body extent -1.01,-0.63 1.01,0.63, height 1
LP5907 [mm] "SOT23, 5-Leads, Body 2,90x2,80mm, Pitch 0,95mm, IPC Medium Density"
  rect 1x0.6 smd: 1(-1.375,0.95) 2(-1.375,0) 3(-1.375,-0.95) 4(1.375,-0.95) 5(1.375,0.95)
  silkscreen extent -1.5,-1.55 0.5,1.92, body extent -0.88,-1.52 0.87,1.53, height 1.45
NX2016SA [mm] "Crystal - 26 MHz"
  rect 0.85x0.75 smd mask+0.075: 1(-0.675,-0.525) 2(0.675,-0.525) 3(0.675,0.525) 4(-0.675,0.525)
  silkscreen extent -1.42,-1.15 1.35,1.15, body extent -1,-0.8 1,0.8, height 0.5
OVSRRGBCC3/SIDE [mm] "LED - RGB, Side-emmiting"
  rect 0.65x0.5 smd mask+0.075: 1(1.575,-0.4) 2(1.575,0.4)
  rect 0.8x1 smd mask+0.075: 3(1.25,1.6) 4(1.25,-1.6)
  silkscreen extent 0.75,-0.85 0.9,0.85, body extent -0.01,-1.6 1.5,1.6, height 1
PESD5V0X1BT [mm] "SOT23, 3-Leads, Body 2,90x2,30mm, Pitch 0,95mm, IPC Medium Density"
  rect 0.9x0.6 smd: 1(-1.15,0.95) 2(-1.15,-0.95) 3(1.15,0)
  silkscreen extent -1.27,-1.5 0.7,1.92, body extent -0.7,-1.5 0.7,1.5, height 1.1
PJ-018H-SMT [mm] "Conn - DC Power, Male, PCB, 4.0 mmOD / 1.7 mmID"
  rrect50% 2.8x1.7 smd: 1(3.4,4.55) 1(7.9,4.55)
  rrect50% 2.8x2.6 smd: 2(3.4,-4.1) 3(7.9,-4.1)
  silkscreen extent 0.3,-4.6 6.1,4.8, body extent 0,-5 9.3,5, height 5.5
R0603 [mm] "Chip Resistor, 2-Leads, Body 1,55x0,85mm, IPC Medium Density"
  rect 0.65x0.95 smd: 1(-0.675,0) 2(0.675,0)
  body extent -0.8,-0.48 0.8,0.48, height 0.5
R1206 [mm] "Chip Resistor, 2-Leads, Body 3,20x1,60mm, IPC Medium Density"
  rect 1.25x1.8 smd: 1(-1.425,0) 2(1.425,0)
  silkscreen extent -0.4,-0.8 0.4,0.8, body extent -1.7,-0.9 1.7,0.9, height 0.7
R2512 [mm] "Chip Resistor, 2-Leads, Body 6,40x3,20mm, IPC Medium Density"
  rect 1.65x3.4 smd: 1(-2.825,0) 2(2.825,0)
  silkscreen extent -1.6,-1.6 1.6,1.6, body extent -3.3,-1.7 3.3,1.7, height 0.9
S2B-PH-K-S [mm] "Conn - Battery, Male, 2 Pin, PCB, Right Angle"
  oval 1.5x2.5 hole 1: 1(-1,6.25) 2(1,6.25)
  silkscreen extent -2.9,7.85 2.9,8.25, body extent -3,0 3,8, height 4.8
SN74LV4T125 [mm] "QFN, 14-Leads, Body 3,50x3,50mm, Pitch 0,50mm/1,50mm, Thermal Pad 2,05x2,05mm, IPC Medium Density"
  oval 0.9x0.25 smd mask+0.07: 1(-1.725,-0.75) 7(1.725,-0.75) 8(1.725,0.75) 14(-1.725,0.75)
  oval 0.25x0.9 smd mask+0.07: 2(-1,-1.725) 3(-0.5,-1.725) 4(0,-1.725) 5(0.5,-1.725) 6(1,-1.725) 9(1,1.725) 10(0.5,1.725) 11(0,1.725) 12(-0.5,1.725) 13(-1,1.725)
  rect 2.05x2.05 smd mask+0.07: Pad(0,0)
  silkscreen extent -2.75,-1.97 1.97,1.97, body extent -1.83,-1.83 1.83,1.83, height 1
STM-LQFP100_N [mm] "Thin QFP, 100-Leads, Body 14x14mm, Pitch 0.5mm, IPC Medium Density"
  oval 1.8x0.3 smd mask+0.05: 1(-7.55,6) 2(-7.55,5.5) 3(-7.55,5) 4(-7.55,4.5) 5(-7.55,4) 6(-7.55,3.5) 7(-7.55,3) 8(-7.55,2.5) 9(-7.55,2) 10(-7.55,1.5) 11(-7.55,1) 12(-7.55,0.5) 13(-7.55,0) 14(-7.55,-0.5) 15(-7.55,-1) 16(-7.55,-1.5) 17(-7.55,-2) 18(-7.55,-2.5) 19(-7.55,-3) 20(-7.55,-3.5) 21(-7.55,-4) 22(-7.55,-4.5) 23(-7.55,-5) 24(-7.55,-5.5) 25(-7.55,-6) 51(7.55,-6) 52(7.55,-5.5) 53(7.55,-5) 54(7.55,-4.5) 55(7.55,-4) 56(7.55,-3.5) 57(7.55,-3) 58(7.55,-2.5) 59(7.55,-2) 60(7.55,-1.5) 61(7.55,-1) 62(7.55,-0.5) 63(7.55,0) 64(7.55,0.5) 65(7.55,1) 66(7.55,1.5) 67(7.55,2) 68(7.55,2.5) 69(7.55,3) 70(7.55,3.5) 71(7.55,4) 72(7.55,4.5) 73(7.55,5) 74(7.55,5.5) 75(7.55,6)
  oval 0.3x1.8 smd mask+0.05: 26(-6,-7.55) 27(-5.5,-7.55) 28(-5,-7.55) 29(-4.5,-7.55) 30(-4,-7.55) 31(-3.5,-7.55) 32(-3,-7.55) 33(-2.5,-7.55) 34(-2,-7.55) 35(-1.5,-7.55) 36(-1,-7.55) 37(-0.5,-7.55) 38(0,-7.55) 39(0.5,-7.55) 40(1,-7.55) 41(1.5,-7.55) 42(2,-7.55) 43(2.5,-7.55) 44(3,-7.55) 45(3.5,-7.55) 46(4,-7.55) 47(4.5,-7.55) 48(5,-7.55) 49(5.5,-7.55) 50(6,-7.55) 76(6,7.55) 77(5.5,7.55) 78(5,7.55) 79(4.5,7.55) 80(4,7.55) 81(3.5,7.55) 82(3,7.55) 83(2.5,7.55) 84(2,7.55) 85(1.5,7.55) 86(1,7.55) 87(0.5,7.55) 88(0,7.55) 89(-0.5,7.55) 90(-1,7.55) 91(-1.5,7.55) 92(-2,7.55) 93(-2.5,7.55) 94(-3,7.55) 95(-3.5,7.55) 96(-4,7.55) 97(-4.5,7.55) 98(-5,7.55) 99(-5.5,7.55) 100(-6,7.55)
  silkscreen extent -7.67,-6.25 6.25,6.82, body extent -7,-7 7,7, height 1.6
TPS73633 [mm] "PSON, 8-Leads, Body 3,00x3,00mm, Pitch 0,65mm, Thermal Pad 1,75x1,50mm, IPC Medium Density"
  rect 0.8x0.4 smd mask+0.05: 1(-1.39,0.975) 2(-1.39,0.325) 3(-1.39,-0.325) 4(-1.39,-0.975) 5(1.39,-0.975) 6(1.39,-0.325) 7(1.39,0.325) 8(1.39,0.975)
  rect 1.5x1.75 smd mask+0.05: Pad(0,0)
  silkscreen extent -2.17,-1.72 1.73,1.77, body extent -1.58,-1.57 1.58,1.58, height 1
"WS-TASU 436331045822" [mm] "Switch - Tactile, Off-Mom, SPST, Side-Actuated"
  rrect50% 1.2x1 smd: 1(2.8,2.6) 2(2.8,0.9) 3(-2.8,2.6) 4(-2.8,0.9)
  silkscreen extent -2.35,3.3 2.35,3.5, body extent -3.2,-1 3.2,3.5, height 1.65

## Part data
ANT1: library part "ANT 2.4 GHz", "Antenna - Inverted F 2.4 GHz"
C1 C2 C3 C4 C5 C6 C7 C8 C9 C10 C11 C12 C13 C14 C15 C16 C17 C18 C19 C20 C21 C22 C23 C24 C25 C26 C27 C28 C29 C30 C31 C32 C33 C34 C35 C36 C37 C38 C39 C40 C41 C42 C43 C44 C45 C46 C47 C48 C49 C50 C51 C52 C53 C54 C55 C56 C57 C58 C59 C60 C61 C62 C63 C64 C65 C66 C67 C68 C69 C70 C71 C72 C73: library part Capacitor, "Capacitor"
D1 D2 D3: "TVS - Bidirectional Zener Diode"
D4 D5: "TVS - Dual Schottky Rail-to-rail Protection"
D6: "LED - RGB, Top/Side-emmiting"
F1: "Filter - RF 2.4 GHz"
J2 JE1 JE2 JE3: library part S2B-PH-K-S, "Conn - Battery, Male, 2 Pin, PCB, Right Angle"
J3: "Conn - DC Power Plug - 4.0 mmOD / 1.7 mmID"
J4: library part ER-CON40HB-2, "Conn - FFC/FPC, 40 Pin, 1.0mm Pitch, ZIF"
J5: library part 3220-10-0200-00, "Conn - JTAG, Header, Male, Right Angle, 10 Pin, 1.27mm Pitch, ARM Standard"
N1 N2 N3: library part 2051-09-SM, "TVS - Gas Discharge Tube"
Q1: "Transistor - MOSFET, P-Channel, 30V, 4.3A"
Q2 Q3 Q4 Q5: "Transistor - MOSFET, N-Channel, 60V, 300mA"
R1 R2 R3 R4 R5 R6 R7 R8 R9 R10 R11 R12 R13 R14 R15 R16 R17 R18 R19 R20 R21 R22 R23 R24 R25 R26 R27 R28 R29 R30 R31 R32 R33 R34 R35 R36 R37 R38 R39 R40 R41 R42 R43 R44 R45 R46 R47 R48 R49 R50 R51: library part Resistor, "Resistor"
SW1: "Switch - Tactile, Off-Mom, SPST, Side-Actuated"
SW2: "Switch - Tactile, Off-Mom, SPST"
U1: "IC - Analog Front End - Medical"
U2: "IC - Fuel Gauge, System-Side Impedance Track"
U3: "IC - Battery Charger, Single Cell Li-Ion/LiPo, 1A"
U4 U5 U6 U7 U8 U9: "Voltage Regulator - Linear"
U10 U11: "IC - Voltage Level Translator"
U12: "IC - Bluetooth 4.0 controller (BR/EDR)"
U13: "ARM Cortex-M3 32-bit MCU, 384 KB Flash, 48 KB Internal RAM, 83 I/Os, 100-pin LQFP, -40 to 85 degC, Tray"
X1: "Crystal - 16 MHz"
X2: "Crystal - 32.768 kHz"
X3: "Crystal - 26 MHz"
Z1: library part KSSG74B16, "Transductor - Buzzer 2.7 kHz"

## Free pads (board coordinates)
  round 1 smd paste-1 mask+0.5: FID1(-15,35.9) FID2(-47.4,-28.9) FID3(41.5,-28.9) FID4(41.5,28.9)
  round 4.5 hole 3.2: ""(-47.4,-35.3) ""(-47.4,35.3) ""(47.4,-35.3)

## Via types
v1: diameter 0.6, hole 0.3, Top Layer to Bottom Layer, tented both sides, 307 vias
v2: diameter 0.75, hole 0.3, Top Layer to Bottom Layer, tented both sides, 137 vias
v3: diameter 0.6, hole 0.3, Top Layer to Bottom Layer, 105 vias
v4: diameter 0.6, hole 0.3, Top Layer to Bottom Layer, tented top, 40 vias
v5: diameter 1.25, hole 0.3, Top Layer to Bottom Layer, 4 vias
v6: diameter 0.75, hole 0.3, Top Layer to Bottom Layer, 3 vias
v7: diameter 1, hole 1, Top Layer to Bottom Layer, 2 vias
v8: diameter 0.75, hole 0.75, Top Layer to Bottom Layer, 2 vias
v9: diameter 1.25, hole 0.3, Top Layer to Bottom Layer, tented both sides, 2 vias
v10: diameter 0.6, hole 0.3, Top Layer to Bottom Layer, tented bottom, 1 vias

## Nets (pads, with @x,y where several pads share a name; then routed paths per layer and width w, separated by ;. In a path a pad name is that pad's centre, name@x,y a point inside that pad or via, vN(x,y) a via of type N, cw(c..) or ccw(c..) an arc to the next point about the centre after c; other vN are vias at no path point)
AFE_CLK: U1.17
AFE_CLKSEL: R12.2 U1.14 | length 9.1
  Top Layer w0.25: R12.2@-37.5,-11 v3(-36.25,-11) ; U1.14@-35.2,-8.5 -33.75,-8.5 v4(-33.25,-8)
  Bottom Layer w0.25: v3(-36.25,-11) -36.25,-8.5 -35.75,-8 v4(-33.25,-8)
AFE_CS: U1.18 U13.29 | length 67.7
  Top Layer w0.25: U1.18@-33.25,-10.95 -33.25,-14.75 -31.25,-16.75 -16.75,-16.75 -14.75,-14.75 -14.75,-1 v3(-13.75,0) ; v4(9.5,0) 11,1.5 U13.29@12.55,1.5
  Bottom Layer w0.25: v3(-13.75,0) -11.75,2 5.5,2 7.5,0 v4(9.5,0)
AFE_DIN: U1.19 U13.32 | length 68.3
  Top Layer w0.25: U1.19@-32.75,-10.95 -32.75,-14.5 -31,-16.25 -17,-16.25 -15.25,-14.5 -15.25,-0.5 v3(-14.75,0) ; v4(9.75,3) U13.32@12.55,3
  Bottom Layer w0.25: v3(-14.75,0) -12.25,2.5 5.75,2.5 7.75,0.5 8.75,0.5 9.75,1.5 v4(9.75,3)
AFE_DOUT: U1.21 U13.31 | length 65
  Top Layer w0.25: U1.21@-31.75,-10.95 -31.75,-14 -30.5,-15.25 -17.5,-15.25 -16.25,-14 -16.25,0.5 v3(-15.75,1) ; v4(9,2) 10,2 10.5,2.5 U13.31@12.55,2.5
  Bottom Layer w0.25: v3(-15.75,1) -13.25,3.5 6.25,3.5 7.75,2 v4(9,2)
AFE_DRDY: U1.22 U13.24 | length 67.1
  Top Layer w0.25: U1.22@-31.25,-10.95 -31.25,-13.75 -30.25,-14.75 -17.75,-14.75 -16.75,-13.75 v3(-16.75,1) ; U13.24@10.5,-1.55 v4(10.5,0)
  Bottom Layer w0.25: v3(-16.75,1) -13.75,4 6.5,4 7.5,3 8.75,3 9.5,3.75 10,3.75 10.5,3.25 v4(10.5,0)
AFE_GPIO: R13.1 U1.25 U1.26 | length 3.5
  Top Layer w0.25: U1.25@-28.8,-9.5 R13.1@-27.175,-9.5 -27.675,-9 U1.26@-28.8,-9
AFE_IN1_N: C1.1 C4.1 D4.3 R8.2 U1.3 | length 16.7
  Top Layer w0.25: U1.3@-31.25,-4.55 -31.25,-2.75 v3(-30.75,-2.25) ; C4.1@-31.25,1.69 -31.125,1.565 -30.815,1.565 -30.25,1 -30.25,-0.25 -30.5,-0.5 -30.5,-1 v3(-29.75,-1.75) ; D4.3@-27.35,-1.4 v3(-26.5,-2.25)
  Top Layer w0.5: C4.1@-31.25,1.69 R8.2@-31.25,4.325
  Bottom Layer w0.25: v3(-29.75,-1.75) -30.25,-1.75 v3(-30.75,-2.25) -30.25,-2.75 -29.5,-2.75 -29,-2.25 v3(-26.5,-2.25)
AFE_IN1_P: C1.2 C3.2 D4.6 R7.2 U1.4 | length 16.9
  Top Layer w0.25: U1.4@-31.75,-4.55 -31.75,-1.75 v3(-31.25,-1.25) ; v3(-29.75,-0.75) -29.75,1 -29.185,1.565 -28.875,1.565 C3.2@-28.75,1.69 ; v3(-26.5,0.75) -26.4,0.75 D4.6@-25.55,-0.1
  Top Layer w0.5: C3.2@-28.75,1.69 -29.81,2.75 C1.2@-29.81,3 -29.81,3.265 R7.2@-28.75,4.325
  Bottom Layer w0.25: v3(-31.25,-1.25) -30.75,-0.75 v3(-29.75,-0.75) -28,-0.75 v3(-26.5,0.75)
AFE_IN2_N: C2.2 C5.2 D5.6 R9.2 U1.5 | length 16.6
  Top Layer w0.25: D5.6@-38.45,-1.4 -37.6,-2.25 v3(-37.5,-2.25) ; v3(-32.75,-2.25) -32.25,-2.75 U1.5@-32.25,-4.55 ; v3(-32.75,-1.25) -33.75,-0.25 -33.75,1 -33.185,1.565 -32.875,1.565 C5.2@-32.75,1.69
  Top Layer w0.5: C5.2@-32.75,1.69 R9.2@-32.75,4.325
  Bottom Layer w0.25: v3(-37.5,-2.25) -35,-2.25 -34.5,-2.75 -33.25,-2.75 v3(-32.75,-2.25) v3(-32.75,-1.25)
AFE_IN2_P: C2.1 C6.1 D5.3 R10.2 U1.6 | length 16
  Top Layer w0.25: v3(-37.5,0.75) D5.3@-36.65,-0.1 ; C6.1@-35.25,1.69 -35.125,1.565 -34.815,1.565 -34.25,1 v3(-34.25,-0.75) ; v3(-34.25,-1.75) -32.75,-3.25 U1.6@-32.75,-4.55
  Top Layer w0.5: C6.1@-35.25,1.69 -34.19,2.75 C2.1@-34.19,3 -34.19,3.265 R10.2@-35.25,4.325
  Bottom Layer w0.25: v3(-37.5,0.75) -36,-0.75 v3(-34.25,-0.75) v3(-34.25,-1.75)
AFE_RESET: U1.15 U13.25 | length 75.1
  Top Layer w0.25: U1.15@-35.2,-9 v4(-32.75,-9) ; v3(-34.75,-12.5) -34.75,-12.536 -34.25,-13.036 -34.25,-15.25 -31.75,-17.75 -16.25,-17.75 -13.75,-15.25 -13.75,-2 v3(-12.75,-1) ; U13.25@11,-1.75 v3(11.75,-1.75) ; U13.25@11,-1.5 U13.25@11.003,-1.5
  Bottom Layer w0.25: v3(-34.75,-12.5) -33.25,-12.5 -32.75,-12 v4(-32.75,-9) ; v3(-12.75,-1) -10.75,1 5,1 7.25,-1.25 11.25,-1.25 v3(11.75,-1.75)
AFE_SCLK: U1.20 U13.30 | length 65.9
  Top Layer w0.25: U1.20@-32.25,-10.95 -32.25,-14.25 -30.75,-15.75 -17.25,-15.75 -15.75,-14.25 -15.75,0 v3(-14.75,1) ; v4(8.25,1.25) 10,1.25 10.75,2 U13.30@12.55,2
  Bottom Layer w0.25: v3(-14.75,1) -12.75,3 6,3 7.75,1.25 v4(8.25,1.25)
AFE_START: U1.16 U13.26 | length 70.5
  Top Layer w0.25: U1.16@-35.2,-9.5 -34.75,-9.5 -34.25,-10 -34.25,-11.75 -33.75,-12.25 -33.75,-15 -31.5,-17.25 -16.5,-17.25 -14.25,-15 -14.25,-1.5 v3(-13.75,-1) ; v3(11.75,-0.75) 11.8,-0.75 U13.26@12.55,0
  Bottom Layer w0.25: v3(-13.75,-1) -11.25,1.5 5.25,1.5 7.5,-0.75 v3(11.75,-0.75)
AFE_VCAP1: C17.2 U1.11 | length 1.8
  Top Layer w0.25: C17.2@-36.81,-6.5 -36.31,-7 U1.11@-35.2,-7
AFE_VCAP2: C16.2 U1.27 | length 1.8
  Top Layer w0.25: U1.27@-28.8,-8.5 -27.69,-8.5 C16.2@-27.19,-8
AFE_VREFP: C14.2 C15.2 U1.9 | length 3.5
  Top Layer w0.25: C15.2@-36.81,-5 -36.56,-5.25 -35.95,-5.25 U1.9@-35.2,-6
  Top Layer w0.5: C15.2@-36.81,-5 C14.2@-36.81,-3.5
AGND: ANT1.2 C3.1 C4.2 C5.1 C6.2 C10.1 C11.1 C12.1 C13.1 C14.1 C15.1 C16.1 C17.1 C18.1 C20.1 C21.2 C22.1 C23.1 C24.1 C25.1 C26.1 C27.1 C28.1 C29.1 C30.1 C31.1 C32.1 C33.1 C34.1 C35.1 C36.1 C37.1 C38.1 C39.1 C40.1 C41.1 C42.1 C43.1 C44.1 C46.1 C47.1 C48.1 C49.1 C50.1 C51.1 C52.1 C53.1 C54.1 C55.1 C56.1 C57.1 C58.1 C59.1 C60.1 C61.1 C62.1 C63.1 C64.1 C65.1 C66.1 C67.1 C68.1 C69.1 C70.1 C71.1 C72.1 C73.1 D4.1 D4.4 D5.1 D5.4 F1.1 F1.3 J2.2 J3.2 J4.1 J4.9 J4.10 J4.11 J4.12 J4.13 J4.14 J4.15 J4.16 J4.40 J5.3 J5.5 J5.9 Q1.1 Q2.2 Q3.2 Q4.2 Q5.2 R13.2 R17.2 R21.2 R22.2 R23.2 R24.2 R25.2 R26.2 R31.2 R32.2 R33.2 R34.2 R35.2 R44.1 R47.1 R49.1 R51.1 SW2.1 SW2.2 U1.10 U1.13 U1.24 U2.3 U2.13 U3.3 U3.Pad U4.2 U5.4 U5.Pad U6.2 U7.2 U8.2 U9.2 U10.1 U10.4 U10.7 U10.9 U10.12 U11.1 U11.4 U11.7 U11.10 U11.13 U12.A10 U12.A11 U12.A24 U12.A28 U12.B3 U12.B9 U12.B10 U12.B11 U12.B34 U12.Pad U13.10 U13.19 U13.20 U13.27 U13.49 U13.74 U13.99 X1.2 X1.4 X3.2 X3.4 | length 159
  Top Layer w0.15: U2.13@-12.55,-23.5 U2.3@-10.775,-23.5 ; v1(11,-17.5) 11,-18.5 11.55,-19.05 U12.B3@12.875,-19.05 ; U12.B11@14.2,-23.375 14.2,-24.7 15,-25.5 v2(15,-26.75) ; U12.B34@14.8,-17.125 14.8,-15.7 15,-15.5 ; U12.A28@20.025,-18.75 21.25,-18.75 21.7,-18.3 C51.1@22,-18.3 ; v1(26,-19.25) 27,-20.25 U11.13@27,-20.525 ; v1(27.25,-26) 28,-25.25 U11.4@28,-23.975 ; U11.10@28.5,-20.525 28.5,-19.25 v1(29.5,-18.25) ; U11.7@29.725,-23 29.75,-22.975 v1(29.75,-23.75) ; v1(31.25,-22.25) 31.25,-21.525 U10.7@31.275,-21.5 ; v1(31.5,-25.25) 32,-24.75 U10.9@32,-23.975 ; U10.4@33,-20.525 v1(33,-19.25) ; v1(33.5,-25.25) U10.12@33.5,-23.975
  Top Layer w0.25: D5.4@-38.5,-0.05 D5.4@-38.45,-0.1 ; U1.10@-35.2,-6.5 v2(-33.75,-6.5) ; U1.24@-30.25,-10.95 -30.2,-11 -27.31,-11 C13.1@-27.25,-11.06 ; D4.4@-25.55,-1.4 D4.4@-25.5,-1.45 ; v2@-16.56,-24.69 C20.1@-16.56,-23.75 ; C21.2@-16.56,-21.25 -16.56,-20.31 v2(-16.5,-20.25) ; R17.2@-13.325,-26 -13.325,-25.575 v2(-12.75,-25) -12.19,-25.56 C22.1@-12.19,-26 ; -4,0.5 -3.625,0.5 U13.99@-2.55,0.5 ; U13.74@-0.5,13.55 -0.5,14.625 -0.5,15 ; C71.1@3,-4.31 3.5,-3.81 U13.10@3.5,-1.55 ; 8,-3 U13.19@8,-1.55 ; 8.5,-3 U13.20@8.5,-1.55 ; U13.27@12.55,0.5 14,0.5 ; U13.49@12.55,11.5 14,11.5 ; C66.1@15.25,11.81 16.5,11.81 C67.1@16.75,12.06 ; v2(23.75,-13.5) J4.40@25.7,-13.5 v2(27.25,-13.5) ; J4.16@25.7,10.5 v1(27.25,10.5) ; J4.15@25.7,11.5 v1(27.25,11.5) ; J4.14@25.7,12.5 v1(27.25,12.5) ; J4.13@25.7,13.5 27.25,13.5 v1(28.25,12.5) ; J4.12@25.7,14.5 27.25,14.5 v1(29.25,12.5) ; J4.11@25.7,15.5 27.25,15.5 v1(29.25,17.5) ; J4.10@25.7,16.5 27.25,16.5 v1(28.25,17.5) ; J4.9@25.7,17.5 v1(27.25,17.5) ; J4.1@25.7,25.5 v2(27.25,25.5)
  Top Layer w0.5: Q1.1@-40.015,-24.45 Q1.1@-40,-24.435 ; v2(-40,-9.5) -39.06,-9.5 C10.1@-39,-9.44 ; v2(-39,-10.25) C10.1@-39,-9.44 ; v2(-39,-6.5) C17.1@-38.19,-6.5 C15.1@-38.19,-5 ; v2(-39,-5) C15.1@-38.19,-5 ; v2(-39,-3.5) C14.1@-38.19,-3.5 C15.1@-38.19,-5 ; D5.4@-38.5,-0.05 v2(-38.5,0.75) ; C11.1@-37.5,-9.44 C10.1@-39,-9.44 ; R25.2@-34,-26.575 R25.2@-33.925,-26.5 ; R23.2@-34,-20.425 R23.2@-33.925,-20.5 ; C5.1@-32.75,0.31 -32.75,0.25 v2(-32,-0.5) -31.25,0.25 C4.2@-31.25,0.31 ; R24.2@-30.075,-26.5 R24.2@-30,-26.575 ; R26.2@-30.075,-20.5 R26.2@-30,-20.425 ; C13.1@-27.25,-11.06 C12.1@-25.75,-11.06 -25.69,-11 v2(-24.75,-11) ; C16.1@-25.825,-8.015 R13.2@-25.825,-9.5 v2(-25,-9.5) ; C16.1@-25.81,-8 v2(-25,-8) ; v2(-25.5,-2.25) D4.4@-25.5,-1.45 ; v2(-22.75,-12.5) C38.1@-21.94,-12.5 -22,-12.56 v2(-22,-13.5) ; v2(-22.75,-6.5) C37.1@-21.94,-6.5 ; v2(-22.75,-5) C40.1@-21.94,-5 ; v2(-22.75,1) C39.1@-21.94,1 -22,1.06 v2(-22,2) ; v2(-13,-20.5) C18.1@-12.19,-20.5 ; v2(-10.75,-12) C28.1@-10.75,-11.19 ; C27.1@-9.56,-14 C27.1@-9.5,-13.94 ; v2(-9.5,6.5) -8.575,6.5 R21.2@-8.5,6.575 ; R22.2@-8.5,10.425 v2(-8.5,11.25) ; v2(-7,0.25) -6.31,0.94 C69.1@-5.25,0.94 ; v2(-4.75,-12) C29.1@-4.75,-11.19 -4.69,-11.25 v2(-3.75,-11.25) ; v2(-4,-22.75) -3.06,-22.75 C35.1@-3,-22.69 v2(-3,-23.5) ; v2(-4,-19) -3.06,-19 C33.1@-3,-18.94 v2(-3,-19.75) ; v2(-1.5,-24.75) R33.2@-0.675,-24.75 ; v2(-1.5,-15.5) R32.2@-0.675,-15.5 ; C68.1@-0.25,16.31 v2(-0.25,17.25) ; v2(1.875,-4.25) 2.94,-4.25 C71.1@3,-4.31 ; SW2.2@1.875,25.25 v2(3.5,25.25) ; v2(3,-23.5) C36.1@3,-22.69 3.06,-22.75 v2(4,-22.75) ; v2(3,-19.75) C34.1@3,-18.94 3.06,-19 v2(4,-19) ; v2(5.5,27) 5.5,27.925 R47.1@5.575,28 ; v2(6.5,25.25) SW2.1@8.125,25.25 ; v2(7.25,-5.75) C72.1@8.06,-5.75 ; v2(7.25,-4.25) C73.1@8.06,-4.25 C72.1@8.06,-5.75 ; 7.75,-21.25 C46.1@8.55,-21.25 ; v2(7.75,-24.25) C59.1@8.55,-24.25 ; 7.75,-23.25 C57.1@8.55,-23.25 ; 7.75,-22.25 C58.1@8.55,-22.25 ; C72.1@8,-5.81 C72.1@8.06,-5.75 ; v2(12.25,-13.75) 13.05,-13.75 C55.1@13,-13.8 ; v2(12.25,-11.5) 13.19,-11.5 C30.1@13.25,-11.44 13.31,-11.5 v2(14.25,-11.5) ; v2(12.25,-7) 13.175,-7 R31.2@13.25,-7.075 v2(13.25,-6.25) ; C56.1@14,-26.7 v2@14.95,-26.7 ; C49.1@15,-13.8 15.05,-13.75 v2(15.75,-13.75) ; v2(15.25,-0.75) C70.1@15.25,0.06 15.31,0 v2(16.25,0) ; v2(16,-27.5) C54.1@16,-26.7 ; C67.1@16.75,11.81 16.81,11.75 v2(17.75,11.75) ; v2(17,-27.5) C47.1@17,-26.7 ; C48.1@17,-13.8 16.95,-13.75 v2(17.75,-13.75) ; v2(17.75,-11.5) 18.69,-11.5 C32.1@18.75,-11.44 18.81,-11.5 v2(19.75,-11.5) ; v2(17.75,-7) 18.69,-7 C31.1@18.75,-7.06 v2(18.75,-6.25) ; C51.1@22.05,-18.25 v2(22.75,-18.25) ; C50.1@22.45,-22.25 22.5,-22.2 v2(22.5,-21.5) ; C53.1@22.45,-16.75 v2(23.25,-16.75) ; v2(24.75,-23.75) C42.1@24.75,-22.94 ; C41.1@36.25,-21.56 v2(36.25,-20.75)
  L1 w0.25: J2.2@-23.75,-31.25 -18.75,-31.25 -18,-30.5 -18,-28.5 -16.5,-27
  L1 w1: -25.158,-31.25 J2.2@-23.75,-31.25
  L1 w1.5: J2.2@-23.75,-31.25 -23.75,-29.625
  other v1: -30.5,-36.75 -29,-36.75 -26.75,-36.75 -31.25,-35.25 -29.75,-35.25 -30.5,-33.75 -31.25,-32.25 -29.75,-32.25 -28.25,-32.25 -26.75,-32.25 -30.5,-30.75 -31.25,-29.25 -29.75,-29.25 10.5,-28.5 13.5,-28.5 -28.75,-27.75 -25.75,-27.75 -6.5,-27 -4,-27 -1.5,-27 1,-27 3.5,-27 6,-27 8.5,-27 11,-27 13,-27 18,-27 20.5,-27 23,-27 38,-27 40.5,-27 -27.25,-26.25 -25.75,-26.25 11,-25.75 13,-25.75 -5.25,-24.5 -2.75,-24.5 2.25,-24.5 4.75,-24.5 12.75,-24.5 19.25,-24.5 21.75,-24.5 39.25,-24.5 41.75,-24.5 -32.4,-24 -31.6,-24 -13.6,-23.8 -12.75,-23.8 -11.9,-23.8 11.75,-23.5 -32.4,-23 -31.6,-23 -13.6,-22.8 -12.75,-22.8 -11.9,-22.8 -6.5,-22 6,-22 40.5,-22 14.9,-21.35 16,-21.35 17.1,-21.35 -46.5,-21 -41.5,-21 -36.5,-21 7.75,-20.25 9,-20.25 10.25,-20.25 14.9,-20.25 16,-20.25 17.1,-20.25 -5.25,-19.5 7,-19.5 39.25,-19.5 41.75,-19.5 14.9,-19.15 16,-19.15 17.1,-19.15 -49,-18.5 -44,-18.5 -39,-18.5 7,-18.5 7,-17.5 -6.5,-17 6,-17 35.5,-17 40.5,-17 -46.5,-16 -41.5,-16 -36.5,-16 34,-15.75 8.25,-15 9.75,-15 -5.25,-14.5 26.75,-14.5 29.25,-14.5 31.75,-14.5 35.5,-14.5 39.25,-14.5 41.75,-14.5 -18.5,-13.75 -49,-13.5 -44,-13.5 -39.25,-13.5 -35.75,-13.5 34,-13.25 2.25,-12.75 3.5,-12.75 4.75,-12.75 6,-12.75 7.25,-12.75 -19.25,-12.5 -17.75,-12.5 29.25,-12 35.5,-12 40.5,-12 1.25,-11.75 8.25,-11.75 -18.5,-11.25 -46.5,-11 -41.5,-11 34,-10.75 1.25,-10.5 8.25,-10.5 31.75,-9.5 35.5,-9.5 41.75,-9.5 1.25,-9.25 8.25,-9.25 -49,-8.5 -44,-8.5 -1,-8.25 0,-8.25 8.25,-8.25 34,-8.25 -4,-7.75 -3,-7.75 -2,-7.75 1,-7.75 -4.75,-7.25 29.25,-7 35.5,-7 39.25,-7 -4.75,-6.25 -46.5,-6 -41.5,-6 34,-5.75 -4.75,-5.25 31.75,-4.5 35.5,-4.5 41.75,-4.5 -4.75,-4.25 -4,-3.75 -3,-3.75 -2,-3.75 -49,-3.5 -44,-3.5 -1,-3.25 0,-3.25 34,-3.25 -21.25,-2 16.75,-2 29.25,-2 35.5,-2 39.25,-2 -46.5,-1 -41.5,-1 34,-0.75 19.25,0.5 31.75,0.5 35.5,0.5 41.75,0.5 -49,1.5 -44,1.5 34,1.75 29.25,3 35.5,3 39.25,3 -46.5,4 -41.5,4 -19,4 34,4.25 31.75,5.5 35.5,5.5 41.75,5.5 -49,6.5 -44,6.5 -21.5,6.5 34,6.75 -16.25,7.25 29.25,8 35.5,8 39.25,8 -46.5,9 -41.5,9 -24,9 -19,9 34,9.25 31.75,10.5 35.5,10.5 41.75,10.5 -49,10.75 -44,10.75 -21.5,10.75 34,11.75 -16.25,12.25 -11.25,12.25 19.5,12.5 22.5,12.5 31.75,12.5 35,12.75 39.25,13 19.5,14 23.75,14 29.25,14 31.75,14 33.75,14 -13.75,14.75 -8.75,14.75 41.75,15.5 -16.25,17.25 34.25,18 39.25,18 11.75,20.5 16.75,20.5 31.75,20.5 36.75,20.5 41.75,20.5 -16.25,22.25 -11.25,22.25 -6.25,22.25 14.25,23 29.25,23 34.25,23 39.25,23 11.75,25.5 16.75,25.5 21.75,25.5 31.75,25.5 36.75,25.5 41.75,25.5 -16.25,27.25 -11.25,27.25 9.25,28 24.25,28 34.25,28 39.25,28 -13.75,29.75 11.75,30.5 26.75,30.5 49.25,30.5 -16.25,32.25 -11.25,32.25 36.75,33 41.75,33 -13.75,34.75 -8.75,34.75 -3.75,34.75 -16.25,37.25 -13.25,37.25 -8.25,37.25 -3.25,37.25 1.75,37.25 6.75,37.25 11.75,37.25 16.75,37.25 21.75,37.25 26.75,37.25 31.75,37.25
  other v2: -33.25,-27.5 -30.75,-27.5 -38.25,-25 -36.75,-25 -27.25,-25 -25.75,-25 -16.5,-24.75 -40,-23.5 -34.75,-20.5 -29.25,-20.5 14,-12.75 -28.75,-11 -35.25,-1.5 -28.75,-1.5
  other v3: -40.25,-31.25
BACKLIGHT_CTRL: J4.2 U13.59 | length 28.2
  Top Layer w0.25: U13.59@7,13.55 7,15.75 8,16.75 19.25,16.75 19.75,17.25 19.75,23.5 20.75,24.5 v3(23.75,24.5) J4.2@25.7,24.5
BOOT0: R50.1 R51.2 U13.94 | length 7.4
  Top Layer w0.25: R50.1@-8.5,5.425 R51.2@-7,5.425 -6.175,5.425 -5.75,5 -5.75,4.25 -4.5,3 U13.94@-2.55,3
BOOT1: R48.1 R49.2 U13.37 | length 4.8
  Top Layer w0.25: U13.37@12.55,5.5 14.5,5.5 15.325,4.675 R49.2@15.325,3
BT_ADC_LDO_OUT: C57.2 U12.A8 | length 3.1
  Top Layer w0.15: C57.2@9.45,-23.25 10.25,-23.25 11.75,-21.75 U12.A8@11.975,-21.75
BT_CL1.5_LDO_OUT: C58.2 U12.A7 | length 3
  Top Layer w0.15: C58.2@9.45,-22.25 10.625,-22.25 11.725,-21.15 U12.A7@11.975,-21.15
BT_DCO_LDO_OUT: C56.2 U12.A12 | length 1.4
  Top Layer w0.15: C56.2@13.9,-25.7 U12.A12@13.9,-24.275
BT_DIG_LDO_OUT: C52.2 C53.2 C54.2 U12.A2 U12.A3 U12.B15 U12.B26 U12.B27 U12.B35 U12.B36 | length 26.7
  Top Layer w0.15: U12.A3@11.975,-18.75 U12.A2@11.975,-18.15 13.35,-18.15 13.6,-17.9 U12.B36@13.6,-17.125 13.6,-15.1 C52.2@14,-14.7 ; C52.2@14.2,-14.9 14.2,-17.7 14.35,-17.85 17.9,-17.85 ; 16.125,-25.25 16.6,-24.775 U12.B15@16.6,-23.375 16.6,-22.65 16.75,-22.5 18,-22.5 18.3,-22.2 18.3,-18.65 ; U12.B26@19.125,-18.45 18.5,-18.45 18.3,-18.65 ; C53.2@21.55,-16.75 19.75,-16.75 19.125,-17.375 U12.B27@19.125,-17.85 17.9,-17.85 ; 17.9,-17.85 18.3,-18.25 18.3,-18.65
BT_HCI_CTS: U11.6 U12.A29 | length 17.7
  Top Layer w0.15: U12.A29@20.025,-18.15 20.6,-18.15 21.25,-17.5 23,-17.5 23.75,-18.25 v3(23.75,-19) ; U11.6@29,-23.975 29,-24.75 v3(29.5,-25.25)
  Bottom Layer w0.15: v3(23.75,-19) 23.75,-23.75 24.5,-24.5 28.75,-24.5 v3(29.5,-25.25)
BT_HCI_RTS: U10.5 U12.A32 | length 20.4
  Top Layer w0.15: U12.A32@18.1,-16.225 18.1,-16.15 19,-15.25 23.5,-15.25 v3(24,-15.75) ; v3(32,-19.25) 32.5,-19.75 U10.5@32.5,-20.525
  Bottom Layer w0.15: v3(24,-15.75) 24,-17.5 24.5,-18 24.5,-19.5 25.5,-20.5 30.75,-20.5 v3(32,-19.25)
BT_HCI_RX: U11.3 U12.A26 | length 13.3
  Top Layer w0.15: U12.A26@20.025,-19.95 21.45,-19.95 v3(21.5,-20) ; v3(25.25,-26) 26.25,-26 27.5,-24.75 U11.3@27.5,-23.975
  Bottom Layer w0.15: v3(21.5,-20) 22.75,-20 23.25,-20.5 23.25,-24 v3(25.25,-26)
BT_HCI_TX: U10.2 U12.A33 | length 24.9
  Top Layer w0.15: U12.A33@17.5,-16.225 17.5,-16 18.75,-14.75 24.5,-14.75 25,-15.25 v3(25,-17.25) ; U10.2@34,-20.525 34,-20.25 v3(34.75,-19.5)
  Bottom Layer w0.15: v3(25,-17.25) 25,-19.25 25.75,-20 29.75,-20 31.25,-18.5 33.75,-18.5 v3(34.75,-19.5)
BT_MLDO_OUT: C59.2 U12.A5 U12.A9 U12.B2 U12.B7 | length 15.4
  Top Layer w0.15: C59.2@9.45,-24.25 v3(10.5,-24.25) 10.5,-23.75 11.9,-22.35 U12.A9@11.975,-22.35 ; U12.A5@11.975,-19.95 13.45,-19.95 ; U12.B7@12.875,-21.45 13.3,-21.45 v4(13.75,-21) 13.75,-20.25 13.45,-19.95 ; U12.B2@12.875,-18.45 13.45,-18.45 13.75,-18.75 13.75,-19.65 13.45,-19.95
  Bottom Layer w0.15: v3(10.5,-24.25) 10.5,-22.25 11,-21.75 12.5,-21.75 13.25,-21 v4(13.75,-21)
BT_NSHUTD: U11.8 U12.A6 | length 36.1
  Top Layer w0.15: v3(11.125,-20.25) 11.425,-20.55 U12.A6@11.975,-20.55 ; v3(24,-26) 24.75,-26.75 25.75,-26.75 26.5,-27.5 30,-27.5 30.5,-27 30.5,-22.275 U11.8@29.725,-21.5
  Bottom Layer w0.15: v3(11.125,-20.25) 13.5,-20.25 14,-19.75 14,-18.5 14.5,-18 19.5,-18 20,-18.5 20,-25.5 20.5,-26 v3(24,-26)
BT_OUT: C45.1 U12.B8 | length 4.2
  Top Layer w0.15: C45.1@12,-25.3 12,-24.755 cw(c13.219,-24.755) 12.357,-23.893 12.5,-23.75 13.25,-23 13.323,-22.927 ccw(c12.896,-22.5) 13.5,-22.5 ccw(c13.05,-22.5) 13.05,-22.05 U12.B8@12.875,-22.05
BT_SLOW_CLK: U11.11 U12.A25 | length 10.6
  Top Layer w0.15: U12.A25@20.025,-20.55 23.45,-20.55 25.5,-18.5 27.5,-18.5 28,-19 U11.11@28,-20.525
BT_SRAM_LDO_OUT: C55.2 U12.B1 | length 3.2
  Top Layer w0.15: U12.B1@12.875,-17.85 12.875,-14.825 C55.2@13,-14.7
CHRG_CHG: R29.2 U3.8 U13.4 | length 65.2
  Top Layer w0.25: U3.8@-29.775,-23.5 v3(-28.5,-23.5) ; R29.2@-8.425,-5 -7.75,-5.675 v3(-7.75,-6.25) ; U13.4@0.5,-1.55 0.5,0 v4(0.75,0.25)
  Bottom Layer w0.25: v3(-28.5,-23.5) -28.5,-22.5 -29,-22 -33.25,-22 -34,-21.25 -34,-19.25 v3(-34.5,-18.75) -33,-17.25 -9.25,-17.25 -7.75,-15.75 v3(-7.75,-6.25) -7.75,-2.75 -6.75,-1.75 -1.25,-1.75 v4(0.75,0.25)
CHRG_IN: C23.2 C24.2 Q1.2 U3.1 | length 3.9
  Top Layer w0.25: v3(-40.25,-20.25) -40.25,-22.315 Q1.2@-40.015,-22.55
  Top Layer w0.5: C23.2@-38.25,-22.81 C24.2@-36.75,-22.81
CHRG_ISET: R23.1 U3.2 | length 3.6
  Top Layer w0.25: U3.2@-34.225,-23 -33.5,-23 -33.25,-22.75 -33.25,-21.5 -32.575,-20.825 R23.1@-32.575,-20.5
CHRG_ISET2: R24.1 U3.7 | length 3.3
  Top Layer w0.25: R24.1@-31.425,-26.175 -30.75,-25.5 -30.75,-24.25 -30.5,-24 U3.7@-29.775,-24
CHRG_JACK: J3.1 Q1.3
  other v3: -40.25,-27.75
CHRG_JACK_DET: C27.2 R28.1 U13.5 | length 32.2
  Top Layer w0.25: C27.2@-10.94,-14 -10.94,-15.485 R28.1@-10.925,-15.5 -10.925,-15.825 -9.75,-17 v3(-8,-17) ; U13.5@1,-1.55 1,-0.5 v4(1.75,0.25)
  Bottom Layer w0.25: v3(-8,-17) -7.25,-16.25 -7.25,-6.75 -7,-6.5 -7,-6 -7.25,-5.75 -7.25,-3 -6.5,-2.25 -0.75,-2.25 v4(1.75,0.25)
CHRG_JACK_DET_PIN: J3.3 R27.2 R28.2 | length 47.8
  Top Layer w0.25: J3.3@-27.9,-30 -27.25,-29.35 v3(-27.25,-27.75) ; R28.2@-9.575,-15.5 R27.2@-8.425,-15.5 -7.25,-16.675 v3(-7.25,-17.75)
  Bottom Layer w0.25: v3(-27.25,-27.75) -26.5,-27 -26.5,-23.75 -28.75,-21.5 -33,-21.5 -33.5,-21 v3(-33.5,-18.75) -32.5,-17.75 v3(-7.25,-17.75)
CHRG_PG: R30.2 U3.5 U13.3 | length 61.9
  Top Layer w0.25: v3(-35.5,-24.5) U3.5@-34.225,-24.5 ; R30.2@-8.425,-3.5 -8.425,-3.325 -8.5,-3.4 -8.25,-3.15 v3(-8.25,-2) ; v4(-0.25,0.25) 0,0 U13.3@0,-1.55
  Bottom Layer w0.25: v3(-35.5,-24.5) v3(-35.5,-18.75) -33.5,-16.75 -9.5,-16.75 -8.25,-15.5 -8.25,-6.75 -8.5,-6.5 -8.5,-6 -8.25,-5.75 v3(-8.25,-2) -7.5,-1.25 -1.75,-1.25 v4(-0.25,0.25)
CHRG_PRETERM: R25.1 U3.4 | length 3.3
  Top Layer w0.25: U3.4@-34.225,-24 -33.5,-24 -33.25,-24.25 -33.25,-25.5 R25.1@-32.575,-26.175
CHRG_TS: R26.1 U3.9 | length 3.6
  Top Layer w0.25: R26.1@-31.425,-20.5 -31.425,-20.825 -30.75,-21.5 -30.75,-22.75 -30.5,-23 U3.9@-29.775,-23
FG_1.8: C22.2 U2.5 | length 6.4
  Top Layer w0.15: C22.2@-10.81,-26 -9.5,-26 -9,-25.5 -9,-23 -9.3,-22.7 U2.5@-10.775,-22.7
FG_BIN: R17.1 U2.10 | length 3.4
  Top Layer w0.15: R17.1@-14.925,-26 -15.5,-25.425 -15.5,-23.75 -15.25,-23.5 U2.10@-14.725,-23.5
FG_GPOUT: R18.2 U2.12 U13.2 | length 46.6
  Top Layer w0.15: v4(-14.725,-24.975) U2.12@-14.725,-24.3
  Top Layer w0.25: v3(-8,-22.5) -8,-20.25 -11.75,-16.5 -11.75,-6.5 -10.25,-5 -10.25,-1 -9.675,-0.425 R18.2@-8.5,-0.425 -7.175,-1.75 -2.75,-1.75 -1.25,-0.25 -0.75,-0.25 -0.5,-0.5 U13.2@-0.5,-1.55
  Bottom Layer w0.25: v4(-14.725,-24.975) -13.7,-26 -9.25,-26 -8,-24.75 v3(-8,-22.5)
FG_SCL: R20.2 R22.1 U2.2 U13.92 | length 48
  Top Layer w0.15: U2.2@-10.775,-23.9 -10.15,-23.9 v3(-9.75,-23.5)
  Top Layer w0.25: v3(-9,-21.5) -9.575,-20.925 -9.575,-20.175 -12.75,-17 -12.75,-6 -11.25,-4.5 -11.25,7.75 -9.925,9.075 R22.1@-8.5,9.075 R20.2@-7,9.075 -6.075,9.075 -4.75,7.75 -4.75,4.75 -4,4 U13.92@-2.55,4
  Bottom Layer w0.25: v3(-9.75,-23.5) -9.75,-22.25 v3(-9,-21.5)
FG_SDA: R19.2 R21.1 U2.1 U13.93 | length 48.9
  Top Layer w0.15: U2.1@-10.775,-24.3 -10.2,-24.3 v3(-9.75,-24.75)
  Top Layer w0.25: v3(-9,-20.5) -9,-20 -12.25,-16.75 -12.25,-6.25 -10.75,-4.75 -10.75,7.5 -10.325,7.925 R21.1@-8.5,7.925 R19.2@-7,7.925 -5.675,7.925 -5.25,7.5 -5.25,4.5 -4.25,3.5 U13.93@-2.55,3.5
  Bottom Layer w0.25: v3(-9.75,-24.75) -10.5,-24 -10.5,-21 -10,-20.5 v3(-9,-20.5)
FG_SR_N: C19.1 C21.1 R16.2 U2.7 | length 6.6
  Top Layer w0.15: C21.1@-17.94,-21.25 -17.865,-21.325 -17.865,-21.685 -17.25,-22.3 U2.7@-14.975,-22.3
  Top Layer w0.25: R16.2@-20.575,-21.425 -20.19,-21.81 C19.1@-19.25,-21.81 -18.5,-21.81 C21.1@-17.94,-21.25
FG_SR_P: C19.2 C20.2 R15.2 U2.8 | length 6.7
  Top Layer w0.15: C20.2@-17.94,-23.75 -17.865,-23.675 -17.865,-23.315 -17.25,-22.7 U2.8@-14.975,-22.7
  Top Layer w0.25: R15.2@-20.575,-23.75 -20.015,-23.19 C19.2@-19.25,-23.19 -18.5,-23.19 C20.2@-17.94,-23.75
FSMC_A16: J4.37 U13.58 | length 48
  Top Layer w0.25: v4(7.5,10.25) 6.75,11 6.75,11.75 7.5,12.5 U13.58@7.5,13.55 ; v3(23.75,-10.5) J4.37@25.7,-10.5 28,-10.5 28.5,-10 28.5,3.5 29.25,4.25 29.25,4.75 v4(28.5,5.5)
  Bottom Layer w0.25: v4(7.5,10.25) 8.25,9.5 18.75,9.5 22.25,6 28,6 v4(28.5,5.5)
FSMC_D0: J4.32 U13.61 | length 40.1
  Top Layer w0.25: U13.61@6,13.55 6,10.75 v4(6.5,10.25) ; J4.32@25.7,-5.5 27.5,-5.5 28,-5 28,4 v4(28.5,4.5)
  Bottom Layer w0.25: v4(6.5,10.25) 7.75,9 18.5,9 22,5.5 27.5,5.5 v4(28.5,4.5)
FSMC_D1: J4.31 U13.62 | length 38.2
  Top Layer w0.25: U13.62@5.5,13.55 5.5,10.25 v4(6.5,9.25) ; J4.31@25.7,-4.5 27,-4.5 27.5,-4 v4(27.5,4.5)
  Bottom Layer w0.25: v4(6.5,9.25) 7.25,8.5 18.25,8.5 21.75,5 27,5 v4(27.5,4.5)
FSMC_D2: J4.30 U13.81 | length 37
  Top Layer w0.25: U13.81@-2.55,9.5 1.5,9.5 v4(2.25,8.75) ; v3(23.75,-3.5) J4.30@25.7,-3.5
  Bottom Layer w0.25: v4(2.25,8.75) 3,8 18,8 23,3 23,-2.75 v3(23.75,-3.5)
FSMC_D3: J4.29 U13.82 | length 36.2
  Top Layer w0.25: U13.82@-2.55,9 0.5,9 v4(1.5,8) ; v3(22.25,-2.5) J4.29@25.7,-2.5
  Bottom Layer w0.25: v4(1.5,8) 2,7.5 17.75,7.5 22.25,3 v3(22.25,-2.5)
FSMC_D4: J4.28 U13.38 | length 16.3
  Top Layer w0.25: U13.38@12.55,6 17,6 24.5,-1.5 J4.28@25.7,-1.5
FSMC_D5: J4.27 U13.39 | length 16
  Top Layer w0.25: U13.39@12.55,6.5 17.25,6.5 24.25,-0.5 J4.27@25.7,-0.5
FSMC_D6: J4.26 U13.40 | length 15.8
  Top Layer w0.25: U13.40@12.55,7 17.5,7 24,0.5 J4.26@25.7,0.5
FSMC_D7: J4.25 U13.41 | length 15.6
  Top Layer w0.25: U13.41@12.55,7.5 17.75,7.5 23.75,1.5 J4.25@25.7,1.5